# Altium PCB NCLP_PI_v2.PcbDoc (part 1 of 2)
Units mm, origin at the board's own origin, x right, y up, seen from the top; angles counter-clockwise.
Board outline 75.03 x 78.89 mm, 6 copper layers (Top Layer, In_1, In_2, In_3, In_4, Bottom Layer), stack 0.816 mm thick; 104 components, 121 nets, 419 pads, 484 vias.
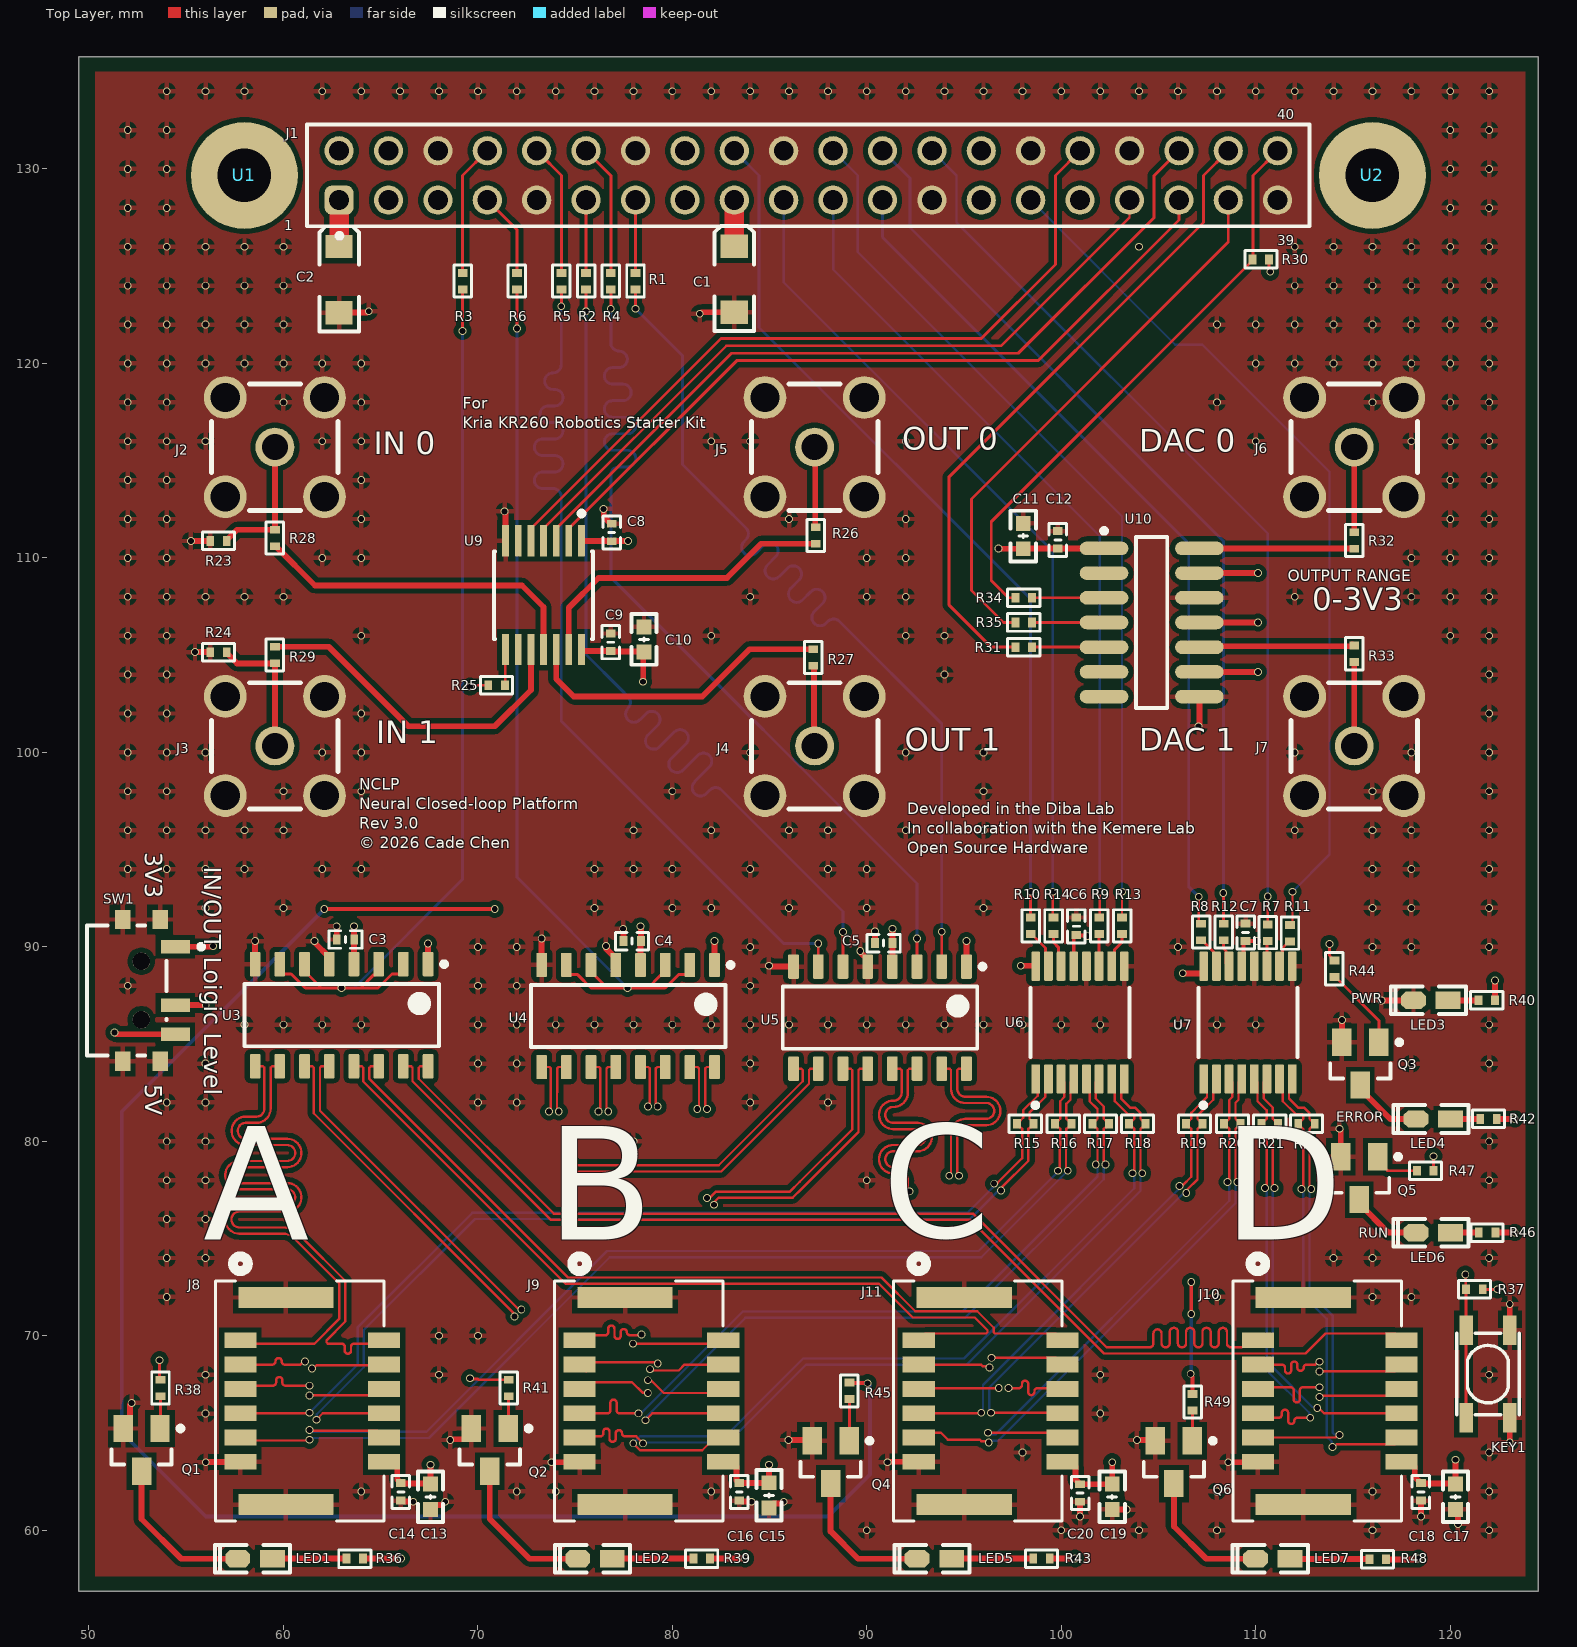
[diagram p0: Top Layer view]
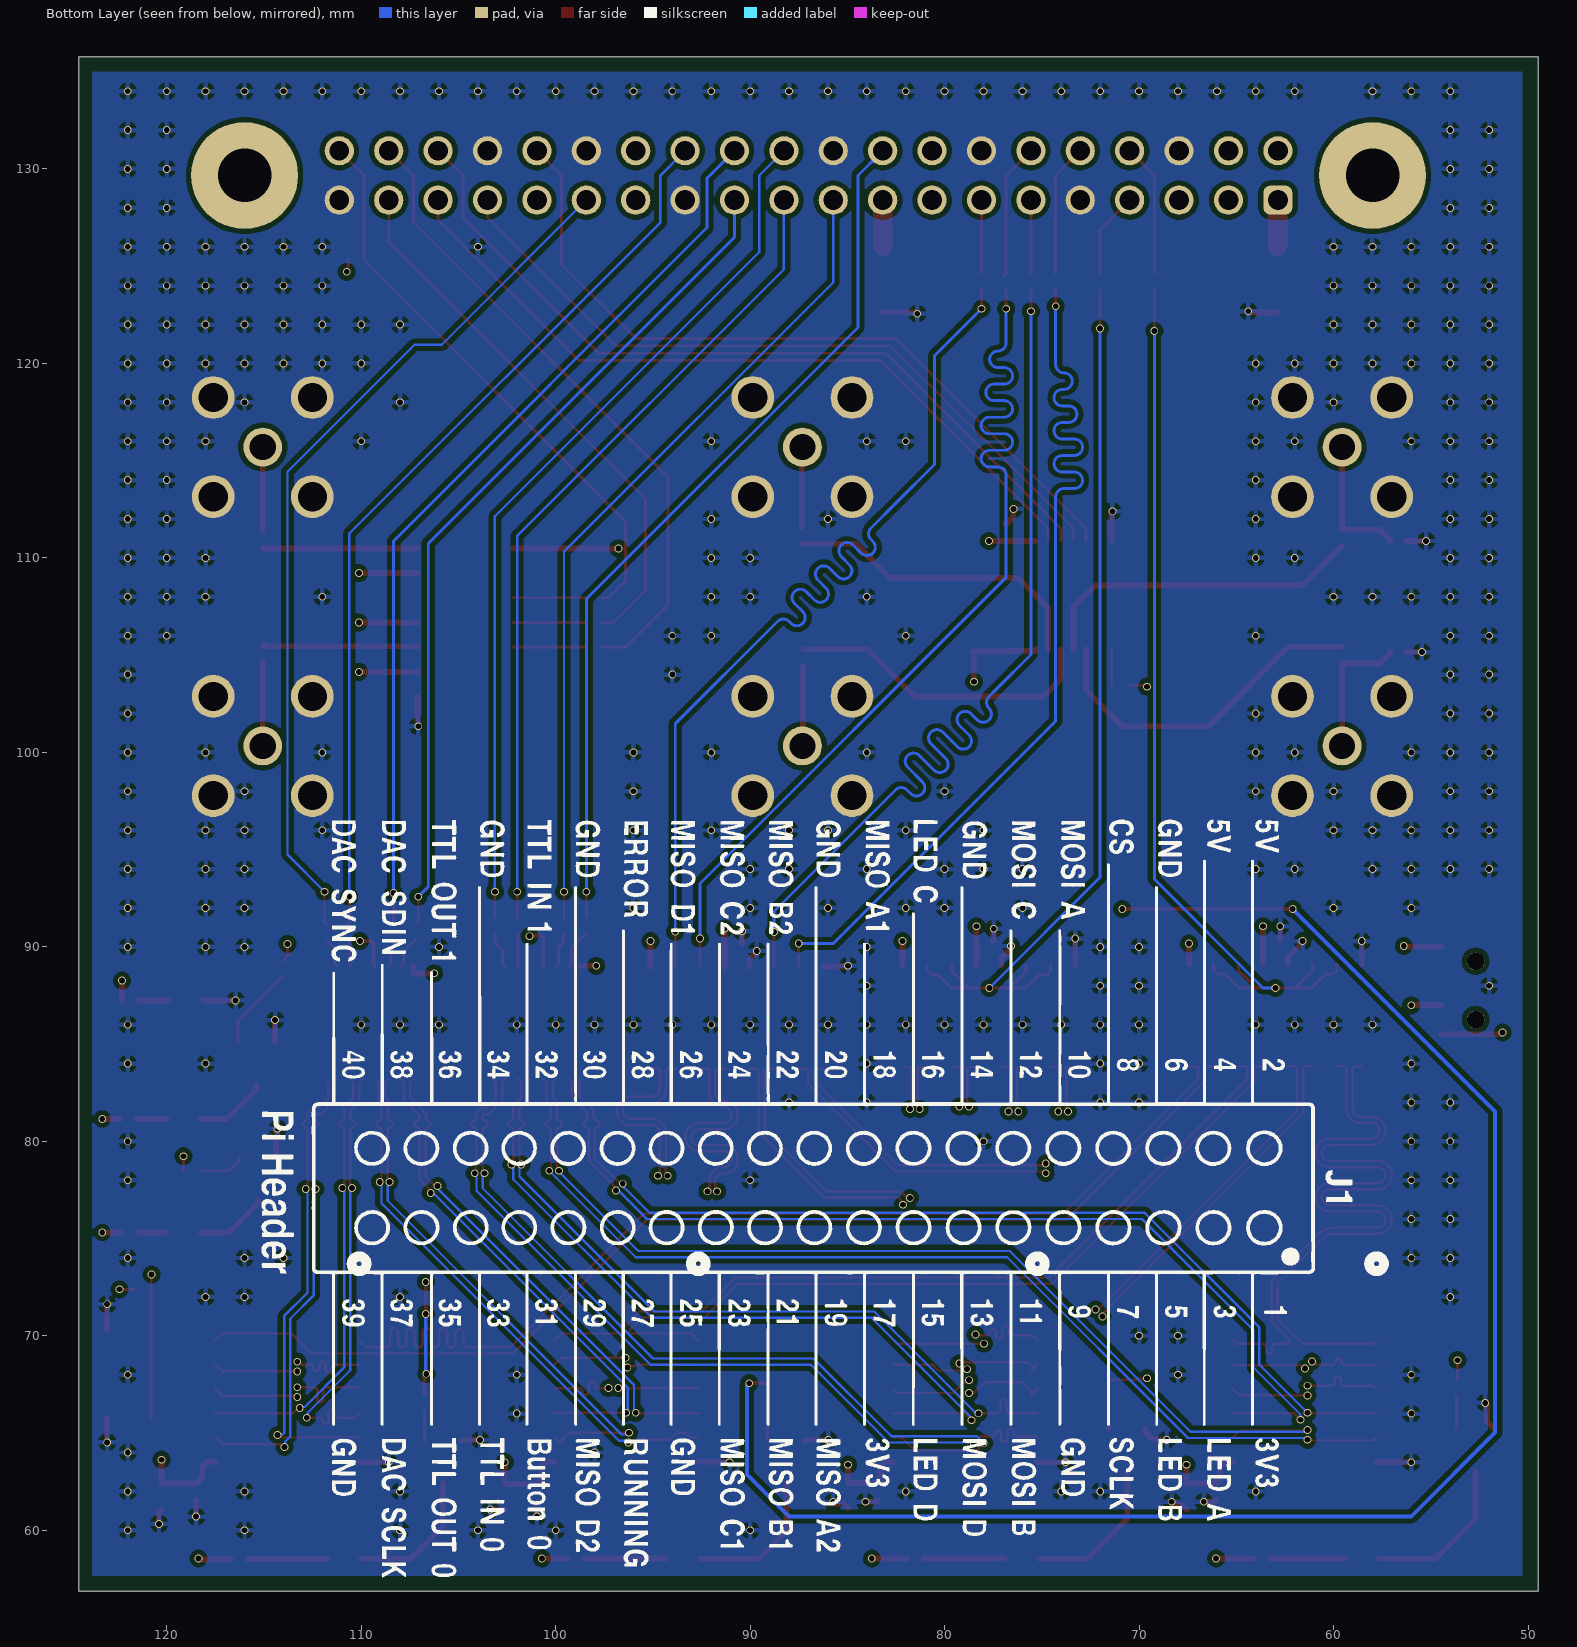
[diagram p1: Bottom Layer view, seen from below]
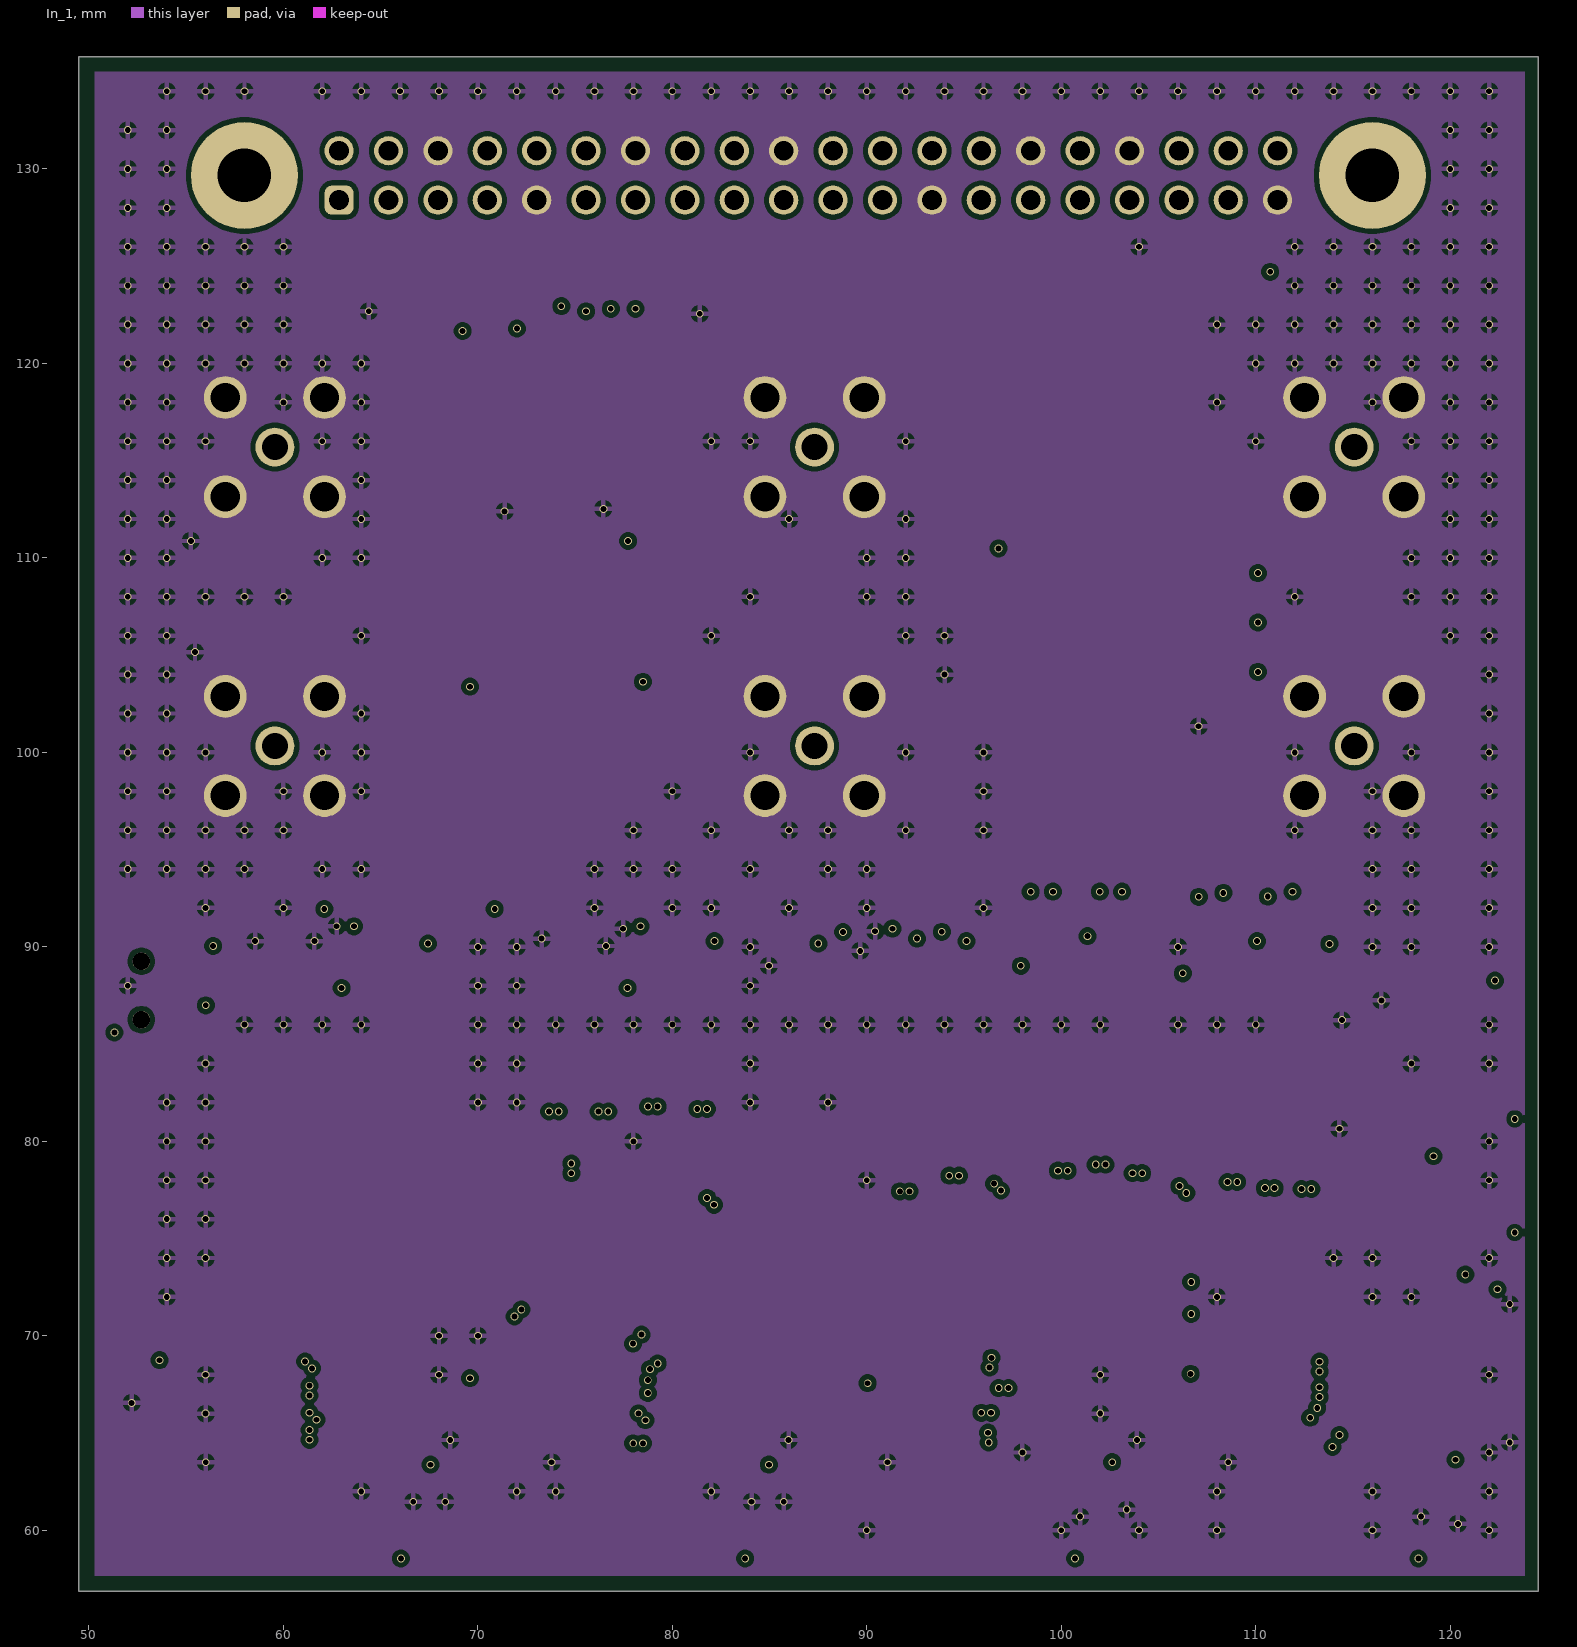
[diagram p2: In_1]
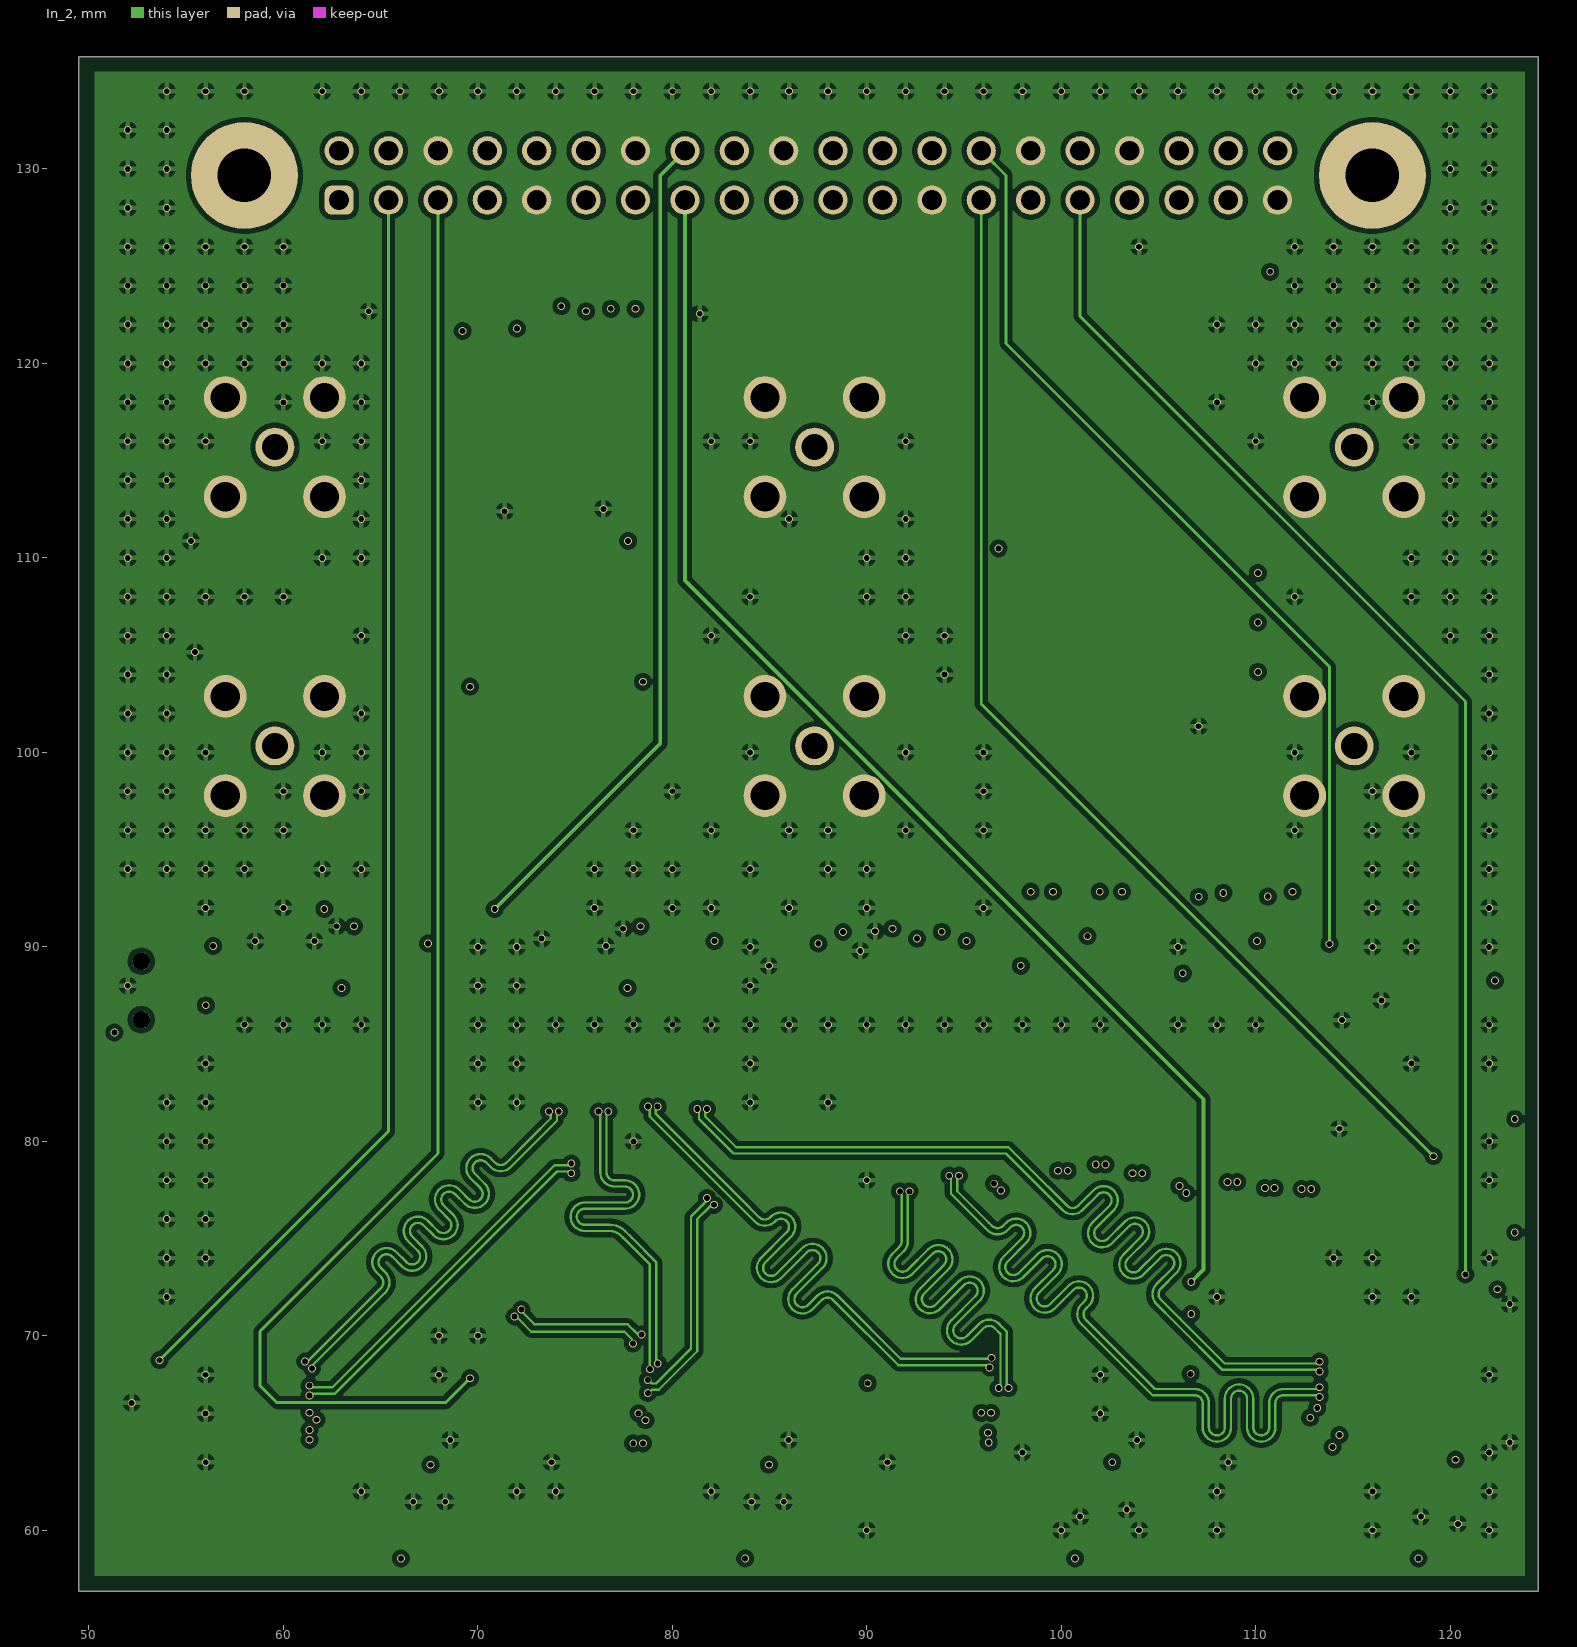
[diagram p3: In_2]
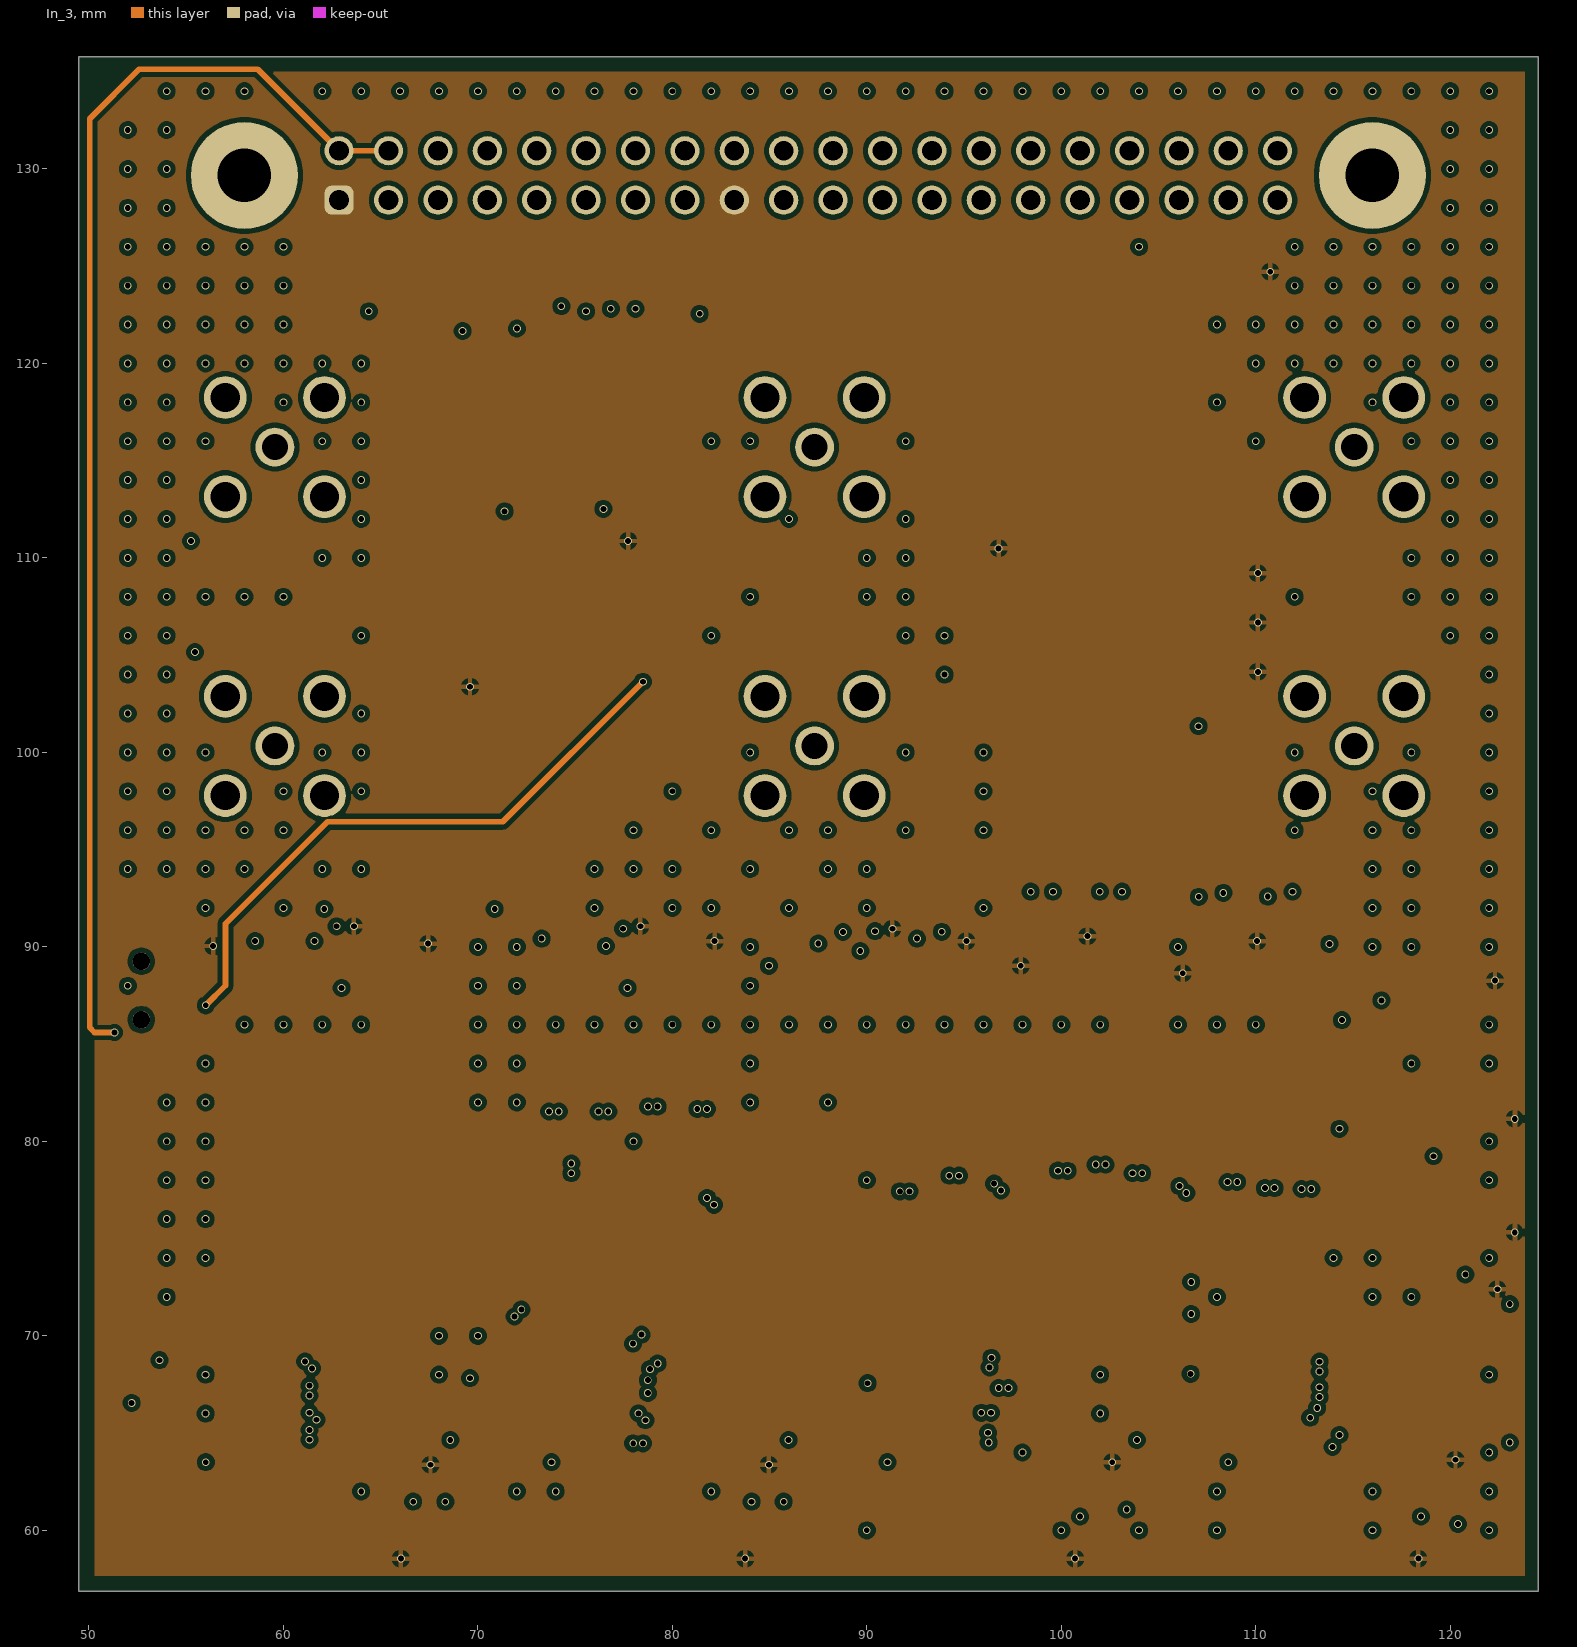
[diagram p4: In_3]
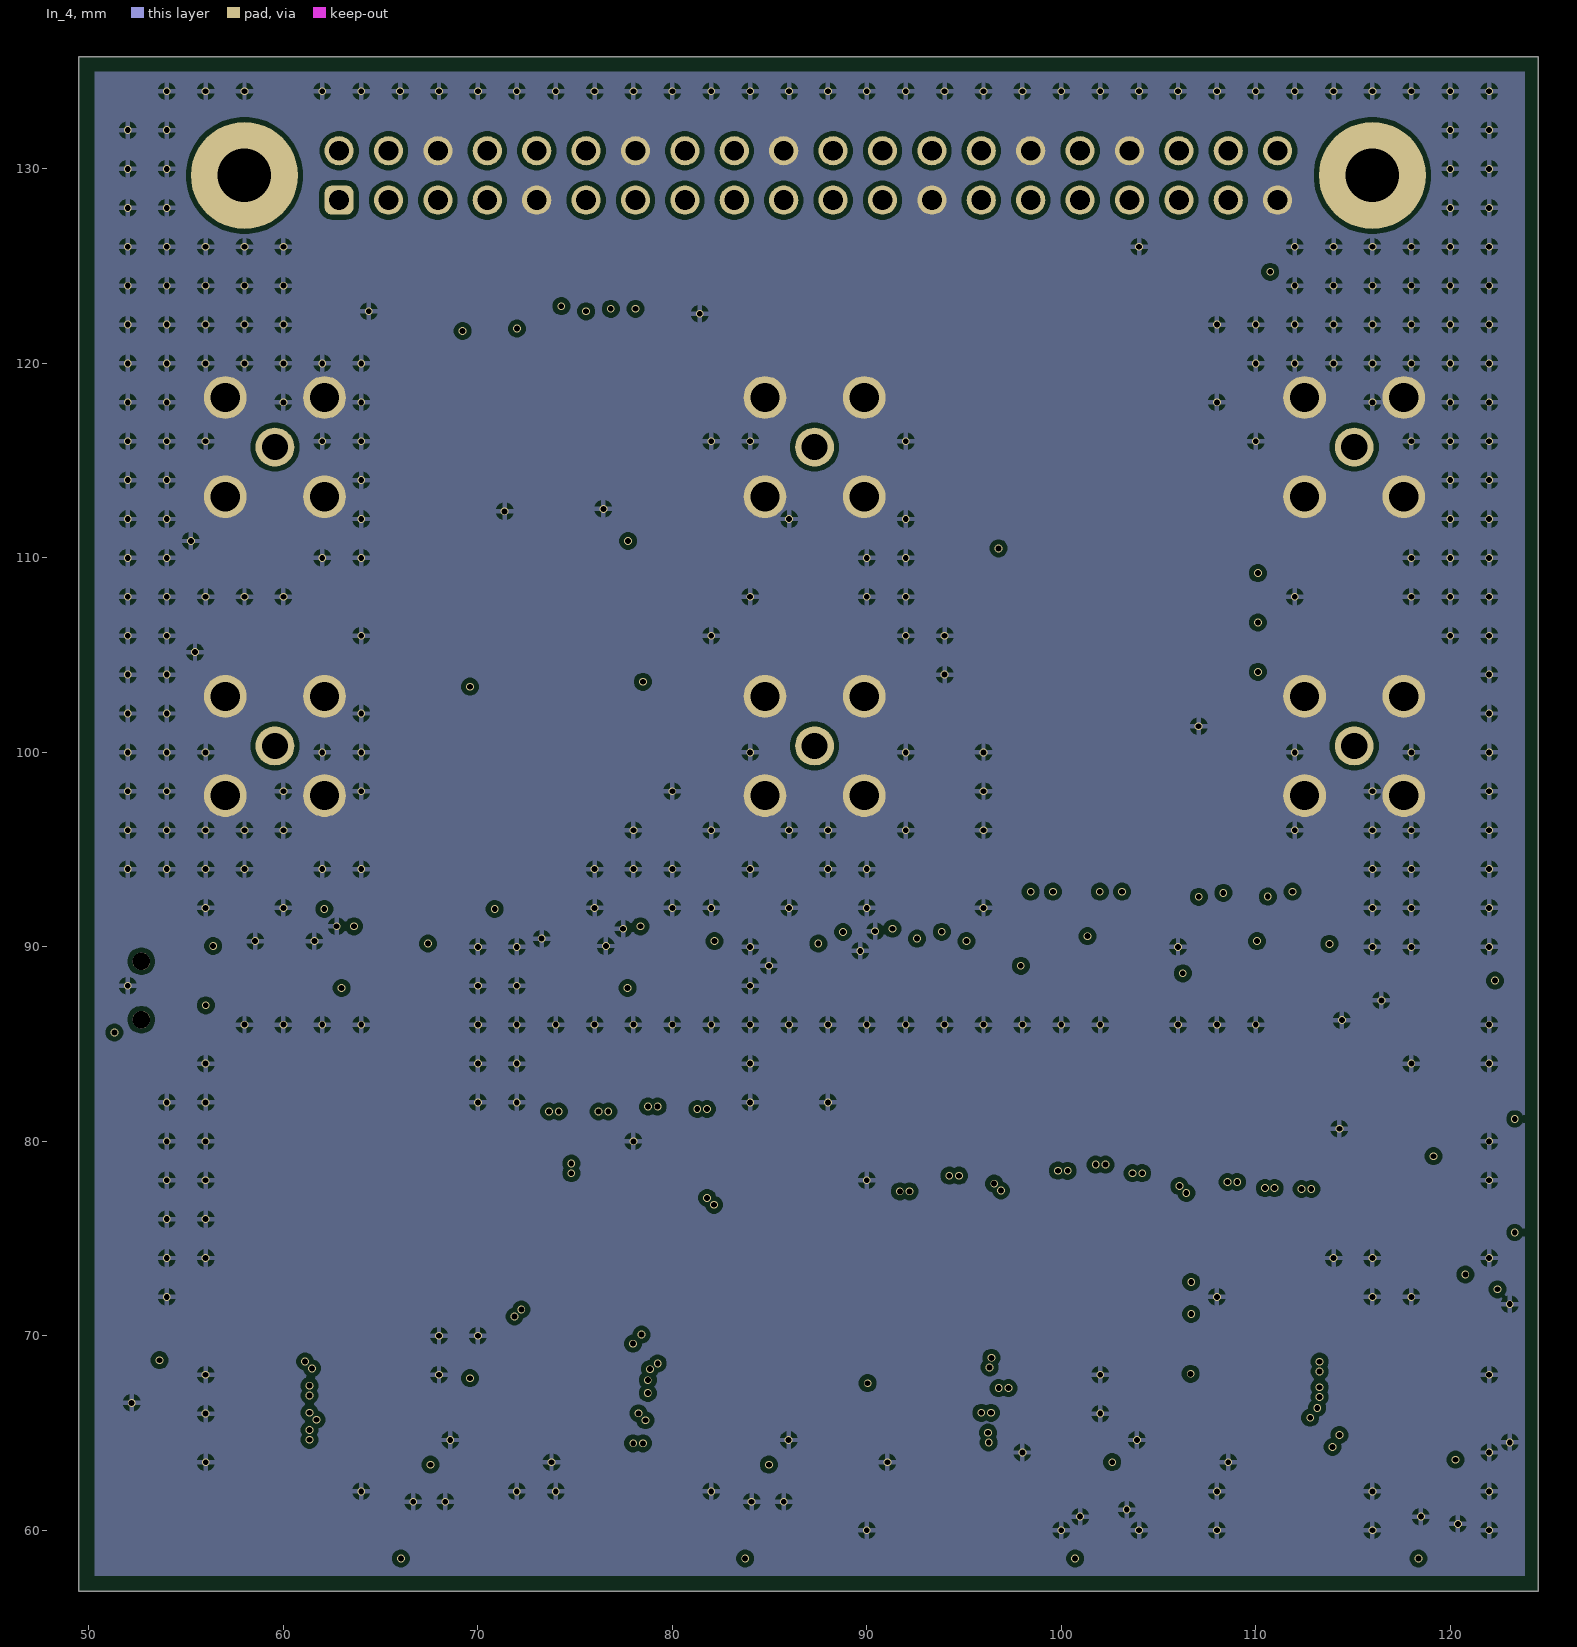
[diagram p5: In_4]
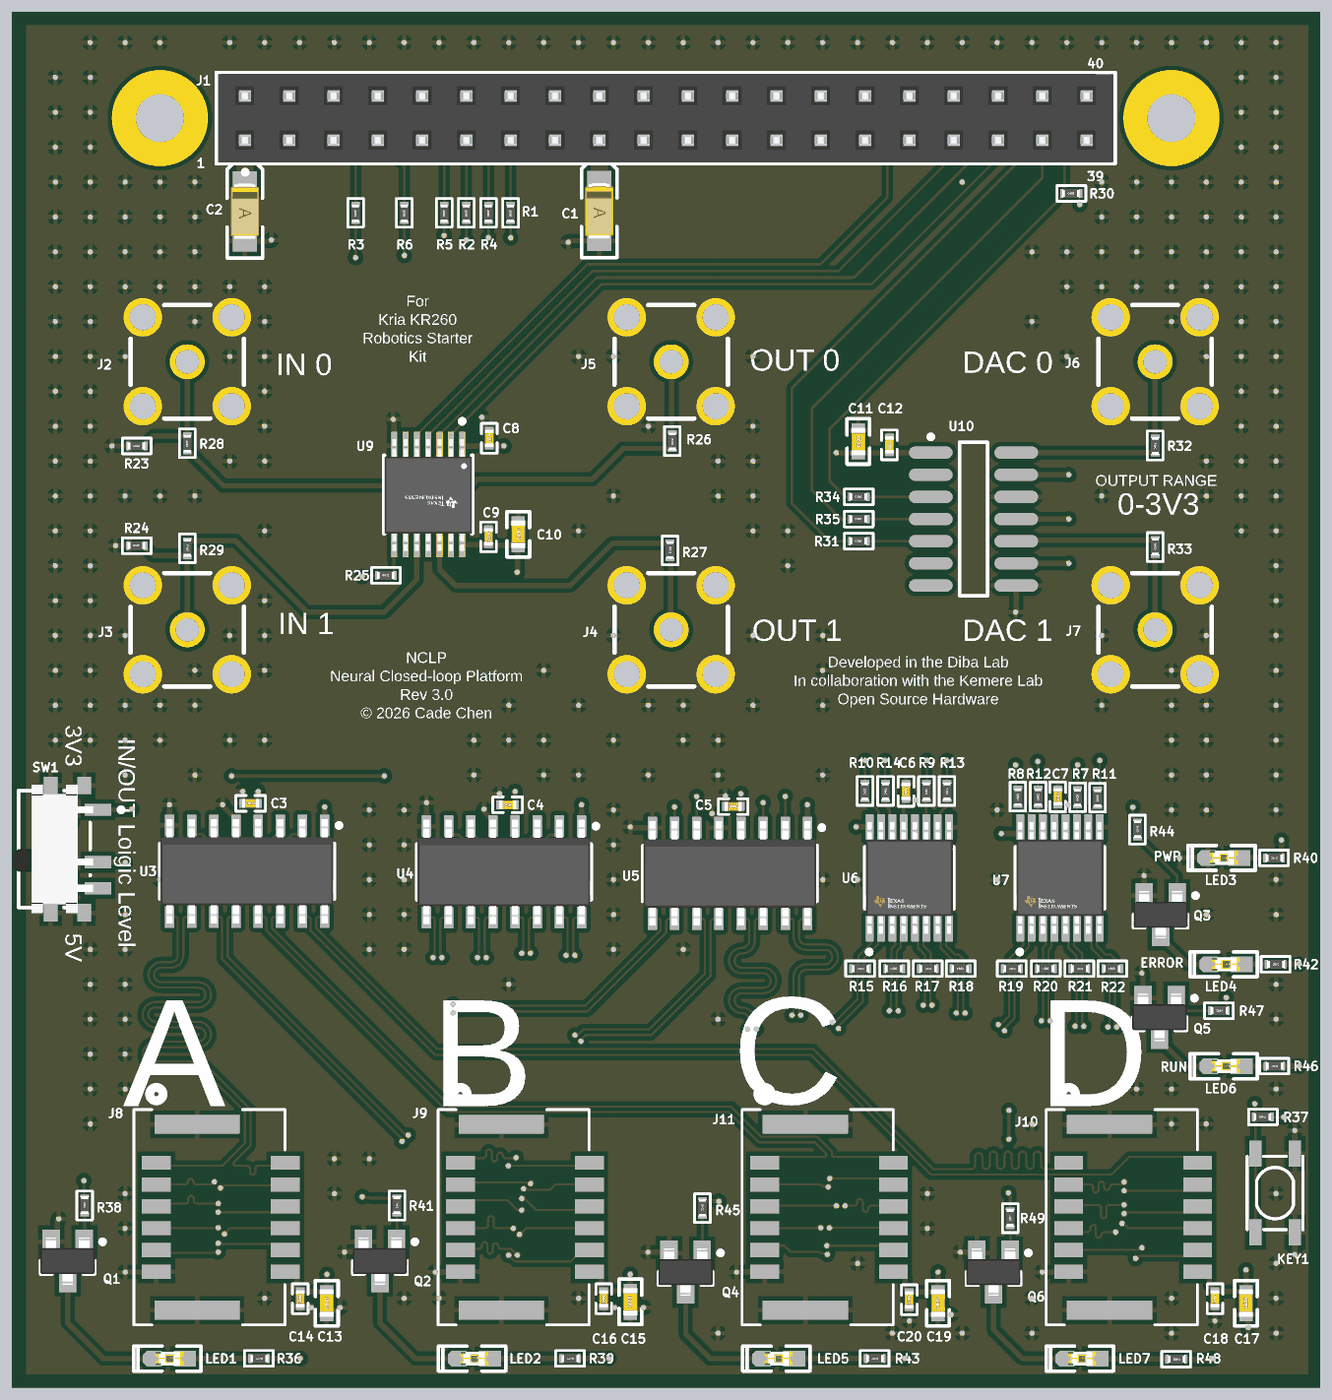
[diagram p7: 3D render of the assembled board from above, using the file's embedded part models]

## Layer stack, top to bottom
Top Solder: solder mask 0.0102, Solder Resist, Dk 3.5
Top Layer: signal copper 0.0356
Dielectric 2: prepreg 0.0711, PP-006, Dk 4.1
In_1: signal copper 0.035
Dielectric 4: prepreg 0.0711, PP-006, Dk 4.1
In_2: signal copper 0.035
Dielectric 1: dielectric 0.32, FR-4, Dk 4.8
In_3: signal copper 0.035
Dielectric 5: prepreg 0.0711, PP-006, Dk 4.1
In_4: signal copper 0.035
Dielectric 3: prepreg 0.0711, PP-006, Dk 4.1
Bottom Layer: signal copper 0.0356
Bottom Solder: solder mask 0.0102, Solder Resist, Dk 3.5

## Board outline
49.484,56.872 49.484,135.763 124.516,135.763 124.516,56.872

## Design rules (kind name [scope] priority, off if disabled: settings)
Clearance Clearance_1 [InPolygon] p1: gap=0.25 ignorepadtopadclearanceinfootprint=FALSE
Clearance [All] p2: gap=0.1 ignorepadtopadclearanceinfootprint=FALSE
ComponentClearance [All] p1: gap=0.1 collisioncheckmode=3 verticalgap=0.1 showdistances=FALSE
DiffPairsRouting [All] p1: maxlimit=10 minlimit=0.2 mostfreqgap=0.2 toplayer_minwidth=0.1 toplayer_maxwidth=10 toplayer_prefwidth=0.12 midlayer1_minwidth=0.1 midlayer1_maxwidth=10 midlayer1_prefwidth=0.12 midlayer2_minwidth=0.1 midlayer2_maxwidth=10 midlayer2_prefwidth=0.12 midlayer3_minwidth=0.1 midlayer3_maxwidth=10 midlayer3_prefwidth=0.12 midlayer4_minwidth=0.1 midlayer4_maxwidth=10 midlayer4_prefwidth=0.12 bottomlayer_minwidth=0.1 bottomlayer_maxwidth=10 bottomlayer_prefwidth=0.12 maxuncoupledlength=12.7
HoleSize [All] p1: absolutevalues=TRUE maxlimit=10 minlimit=0.3 maxpercent=80.000 minpercent=20.000
HoleToHoleClearance [All] p1: gap=0.1 allowstackedmicrovias=TRUE
MatchedLengths SPI [InNetClass('SPI')] p1: tolerance=3 checknetsindiffpair=FALSE checkdiffpairvsdiffpair=TRUE checkxsignals=TRUE checkothers=TRUE
MatchedLengths LVDS_D [InDifferentialPairClass('D')] p2: tolerance=3 checknetsindiffpair=FALSE checkdiffpairvsdiffpair=TRUE checkxsignals=TRUE checkothers=TRUE
MatchedLengths LVDS_C [InDifferentialPairClass('C')] p3: tolerance=5 checknetsindiffpair=FALSE checkdiffpairvsdiffpair=TRUE checkxsignals=TRUE checkothers=TRUE
MatchedLengths LVDS_B [InDifferentialPairClass('B')] p4: tolerance=3 checknetsindiffpair=FALSE checkdiffpairvsdiffpair=TRUE checkxsignals=TRUE checkothers=TRUE
MatchedLengths LVDS_A [InDifferentialPairClass('A')] p5: tolerance=3 checknetsindiffpair=FALSE checkdiffpairvsdiffpair=TRUE checkxsignals=TRUE checkothers=TRUE
MatchedLengths [InDifferentialPairClass('All Differential Pairs')] p6: tolerance=0.5 checknetsindiffpair=TRUE checkdiffpairvsdiffpair=FALSE checkxsignals=FALSE checkothers=FALSE
MinimumSolderMaskSliver [All] p1: minsoldermaskwidth=0
PolygonConnect [All] p1: thpad.connectstyle=Direct thpad.reliefconductorwidth=0.254 thpad.reliefentries=4 thpad.polygonreliefangle="90 Angle" thpad.airgapwidth=0.254 smdpad.connectstyle=Relief smdpad.reliefconductorwidth=0.254 smdpad.reliefentries=4 smdpad.polygonreliefangle="90 Angle" smdpad.airgapwidth=0.254 via.connectstyle=Relief via.reliefconductorwidth=0.254 via.reliefentries=4 via.polygonreliefangle="90 Angle" via.airgapwidth=0.254
RoutingVias [All] p1: holewidth=0.3 width=0.4 viastyle="Through Hole" minholewidth=0.3 minwidth=0.4 maxholewidth=0.711 maxwidth=1.27
SilkToSilkClearance [All] p1: silktosilkclearance=0
SilkToSolderMaskClearance [IsPad] p1: minsilkscreentomaskgap=0 clearancetoexposedcopper=TRUE
SolderMaskExpansion [All] p1: expansion=0 istentingtop=FALSE
SupplyNets "Schematic Supply Nets_2" [InNet('3V3')] p1: voltage=0.000
SupplyNets "Schematic Supply Nets_1" [InNet('GND')] p2: voltage=0.000
SupplyNets "Schematic Supply Nets" [InNet('5V')] p3: voltage=0.000
Width [All] p1: maxlimit=2 minlimit=0.1 preferedwidth=0.15
23 further rules are at their usual default settings.

## Classes and differential pairs
net class SPI: CS' MOSI_A' MOSI_B' MOSI_C' MOSI_D' SCLK'
differential pair class D: CS_D MOSI_D SCLK_D
differential pair class C: CS_C MOSI_C SCLK_C
differential pair class B: CS_B MOSI_B SCLK_B
differential pair class A: CS_A MOSI_A SCLK_A
component class SMA: C8 C9 C10 C11 C12 J2 J3 J4 J5 J6 J7 R23 R24 R25 R26 R27 R28 R29 R30 R31 R32 R33 R34 R35 SW1 U9 U10
component class Connectors: C13 C14 C15 C16 C17 C18 C19 C20 J8 J9 J10 J11
component class LVDS_TX: C3 C4 C5 U3 U4 U5
component class LVDS_RX: C6 C7 R15 R16 R17 R18 R19 R20 R21 R22 U6 U7
component class LED_Button: KEY1 LED1 LED2 LED3 LED4 LED5 LED6 LED7 Q1 Q2 Q3 Q4 Q5 Q6 R36 R37 R38 R39 R40 R41 R42 R43 R44 R45 R46 R47 R48 R49
component class Header: C1 C2 J1 R1 R2 R3 R4 R5 R6 R7 R8 R9 R10 R11 R12 R13 R14 U1 U2
differential pair SCLK_D: +SCLK_D_P -SCLK_D_N
differential pair SCLK_C: +SCLK_C_P -SCLK_C_N
differential pair SCLK_B: +SCLK_B_P -SCLK_B_N
differential pair SCLK_A: +SCLK_A_P -SCLK_A_N
differential pair MOSI_D: +MOSI_D_P -MOSI_D_N
differential pair MOSI_C: +MOSI_C_P -MOSI_C_N
differential pair MOSI_B: +MOSI_B_P -MOSI_B_N
differential pair MOSI_A: +MOSI_A_P -MOSI_A_N
differential pair MISO_D2: +MISO_D2_P -MISO_D2_N
differential pair MISO_D1: +MISO_D1_P -MISO_D1_N
differential pair MISO_C2: +MISO_C2_P -MISO_C2_N
differential pair MISO_C1: +MISO_C1_P -MISO_C1_N
differential pair MISO_B2: +MISO_B2_P -MISO_B2_N
differential pair MISO_B1: +MISO_B1_P -MISO_B1_N
differential pair MISO_A2: +MISO_A2_P -MISO_A2_N
differential pair MISO_A1: +MISO_A1_P -MISO_A1_N
differential pair CS_D: +CS_D_P -CS_D_N
differential pair CS_C: +CS_C_P -CS_C_N
differential pair CS_B: +CS_B_P -CS_B_N
differential pair CS_A: +CS_A_P -CS_A_N

## Components (designator, comment, footprint, x,y, rotation, side; value= is the part's Value field where it differs from the comment)
C1 "47uF" "CD A(3216)" 83.185,124.333 r270 top
C2 "47uF" "CD A(3216)" 62.863,124.312 r270 top
C3 "100n" "C 0402_L" 63.195,90.379 r0 top
C4 "100n" "C 0402_L" 77.934,90.297 r0 top
C5 "100n" "C 0402_L" 90.869,90.197 r0 top
C6 "100n" "C 0402_L" 100.775,91.059 r270 top
C7 "100n" "C 0402_L" 109.474,90.747 r270 top
C8 "100n" "C 0402_L" 76.883,111.312 r270 top
C9 "100n" "C 0402_L" 76.835,105.664 r270 top
C10 "10u" "C 0603_L" 78.543,105.806 r270 top
C11 "10u" "C 0603_L" 98.044,111.125 r270 top
C12 "100n" "C 0402_L" 99.822,110.929 r270 top
C13 "10u" "C 0603_L" 67.564,61.722 r90 top
C14 "100n" "C 0402_L" 66.04,61.976 r90 top
C15 "10u" "C 0603_L" 84.97,61.798 r90 top
C16 "100n" "C 0402_L" 83.439,61.976 r90 top
C17 "10u" "C 0603_L" 120.269,61.722 r90 top
C18 "100n" "C 0402_L" 118.491,61.976 r90 top
C19 "10u" "C 0603_L" 102.616,61.722 r90 top
C20 "100n" "C 0402_L" 100.965,61.918 r90 top
J1 "Pi Header" 61304021821 86.995,129.667 r0 top locked
J2 "6GHz" "PCBComponent_1 - duplicate2" 59.563,115.697 r0 top
J3 "6GHz" "PCBComponent_1 - duplicate2" 59.563,100.33 r0 top
J4 "6GHz" "PCBComponent_1 - duplicate2" 87.312,100.33 r0 top
J5 "6GHz" "PCBComponent_1 - duplicate2" 87.312,115.697 r0 top
J6 "6GHz" "PCBComponent_1 - duplicate2" 115.062,115.697 r0 top
J7 "6GHz" "PCBComponent_1 - duplicate2" 115.062,100.33 r0 top
J8 "5054331271" CONN_505433_12_MOL 60.833,66.645 r90 top locked
J9 "5054331271" CONN_505433_12_MOL 78.273,66.645 r90 top locked
J10 "5054331271" CONN_505433_12_MOL 113.153,66.645 r90 top locked
J11 "5054331271" CONN_505433_12_MOL 95.713,66.645 r90 top locked
KEY1 "Button" KEY_SOP324225 120.338,70.136 r270 top
LED1 "LED_GREEN" "LED 0603R" 58.547,58.547 r180 top
LED2 "LED_GREEN" "LED 0603R" 76.025,58.547 r180 top
LED3 "LED_GREEN" "LED 0603R" 118.999,87.256 r180 top
LED4 "LED_RED" "LED 0603R" 119.126,81.153 r180 top
LED5 "LED_GREEN" "LED 0603R" 93.472,58.547 r180 top
LED6 "LED_GREEN" "LED 0603R" 119.126,75.311 r180 top
LED7 "LED_GREEN" "LED 0603R" 110.871,58.547 r180 top
Q1 "MMBT3904" FAIR-SOT23-3_V 52.705,64.135 r270 top
Q2 "MMBT3904" FAIR-SOT23-3_V 70.612,64.135 r270 top
Q3 "MMBT3904" FAIR-SOT23-3_V 115.377,83.99 r270 top
Q4 "MMBT3904" FAIR-SOT23-3_V 88.138,63.5 r270 top
Q5 "MMBT3904" FAIR-SOT23-3_V 115.316,78.105 r270 top
Q6 "MMBT3904" FAIR-SOT23-3_V 105.791,63.5 r270 top
R1 "22" "R 0402_L" 78.105,124.206 r90 top
R2 "22" "R 0402_L" 75.565,124.206 r90 top
R3 "22" "R 0402_L" 69.215,124.206 r90 top
R4 "22" "R 0402_L" 76.835,124.206 r90 top
R5 "22" "R 0402_L" 74.295,124.206 r90 top
R6 "22" "R 0402_L" 72.009,124.206 r90 top
R7 "22" "R 0402_L" 110.615,90.703 r90 top
R8 "22" "R 0402_L" 107.188,90.736 r90 top
R9 "22" "R 0402_L" 101.949,91.059 r90 top
R10 "22" "R 0402_L" 98.425,91.059 r90 top
R11 "22" "R 0402_L" 111.76,90.678 r90 top
R12 "22" "R 0402_L" 108.349,90.737 r90 top
R13 "22" "R 0402_L" 103.124,91.059 r90 top
R14 "22" "R 0402_L" 99.6,91.059 r90 top
R15 "100" "R 0402_L" 98.171,80.899 r180 top
R16 "100" "R 0402_L" 100.076,80.899 r0 top
R17 "100" "R 0402_L" 102.05,80.899 r180 top
R18 "100" "R 0402_L" 103.886,80.899 r0 top
R19 "100" "R 0402_L" 106.865,80.899 r180 top
R20 "100" "R 0402_L" 108.77,80.899 r0 top
R21 "100" "R 0402_L" 110.744,80.899 r180 top
R22 "100" "R 0402_L" 112.58,80.899 r0 top
R23 "100K" "R 0402_L" 56.642,110.871 r0 top
R24 "100K" "R 0402_L" 56.642,105.156 r0 top
R25 "1K" "R 0402_L" 70.937,103.454 r0 top
R26 "22" "R 0402_L" 87.376,111.125 r90 top
R27 "22" "R 0402_L" 87.249,104.902 r270 top
R28 "22" "R 0402_L" 59.563,110.998 r90 top
R29 "22" "R 0402_L" 59.563,105.029 r270 top
R30 "10K" "R 0402_L" 110.236,125.349 r0 top
R31 "22" "R 0402_L" 98.044,105.41 r0 top
R32 "22" "R 0402_L" 115.062,110.871 r90 top
R33 "22" "R 0402_L" 115.062,105.098 r270 top
R34 "22" "R 0402_L" 98.044,107.95 r0 top
R35 "22" "R 0402_L" 98.044,106.68 r0 top
R36 "1K" "R 0402_L" 63.696,58.547 r180 top
R37 "10K" "R 0402_L" 121.216,72.39 r0 top
R38 "10K" "R 0402_L" 53.681,67.341 r270 top
R39 "1K" "R 0402_L" 81.534,58.547 r180 top
R40 "1K" "R 0402_L" 121.901,87.249 r180 top
R41 "10K" "R 0402_L" 71.585,67.341 r270 top
R42 "1K" "R 0402_L" 121.989,81.153 r180 top
R43 "1K" "R 0402_L" 99.002,58.547 r180 top
R44 "10K" "R 0402_L" 114.046,88.9 r270 top
R45 "10K" "R 0402_L" 89.105,67.197 r270 top
R46 "1K" "R 0402_L" 121.92,75.311 r180 top
R47 "10K" "R 0402_L" 118.745,78.486 r180 top
R48 "1K" "R 0402_L" 116.292,58.504 r180 top
R49 "10K" "R 0402_L" 106.752,66.613 r270 top
SW1 "PCM12SMTR" FP-PCM12SMTR-MFG 51.943,87.757 r270 top
U1 "MOUNTING HOLE" mounting_hole#1 57.912,129.413 r0 top locked
U2 "MOUNTING HOLE" mounting_hole#2 116.205,129.54 r0 top
U3 "DS90LV047ATM/NOPB" D0016A_L 62.992,86.487 r270 top
U4 "DS90LV047ATM/NOPB" D0016A_L 77.724,86.445 r270 top
U5 "DS90LV047ATM/NOPB" D0016A_L 90.678,86.36 r270 top
U6 "DS90LV048ATMTCX/NOPB" FP-PW0016A-MFG 100.965,86.106 r90 top
U7 "DS90LV048ATMTCX/NOPB" FP-PW0016A-MFG 109.601,86.106 r90 top
U9 "TXU0204QPWRQ1" FP-PW0014A-MFG 73.376,108.083 r270 top
U10 "MCP4922T-E/SL" SOIC-SL14_M 104.648,106.68 r0 top

## Footprints (in the part's own frame and the unit in brackets; to place one, negate y for a bottom-side part, rotate by r counter-clockwise, add the part's x,y. Pads: shape width x height; smd on the part's side, far side on the other; paste and mask are expansions set on the pad)
61304021821 [mm] "Socket Header, Pitch 2.54 mm, THT, Vertical, dual row, 40p"
  rrect50% 1.5x1.5 hole 1.02: 1(-24.13,-1.27)
  round 1.5 hole 1.02: 2(-24.13,1.27) 3(-21.59,-1.27) 4(-21.59,1.27) 5(-19.05,-1.27) 6(-19.05,1.27) 7(-16.51,-1.27) 8(-16.51,1.27) 9(-13.97,-1.27) 10(-13.97,1.27) 11(-11.43,-1.27) 12(-11.43,1.27) 13(-8.89,-1.27) 14(-8.89,1.27) 15(-6.35,-1.27) 16(-6.35,1.27) 17(-3.81,-1.27) 18(-3.81,1.27) 19(-1.27,-1.27) 20(-1.27,1.27) 21(1.27,-1.27) 22(1.27,1.27) 23(3.81,-1.27) 24(3.81,1.27) 25(6.35,-1.27) 26(6.35,1.27) 27(8.89,-1.27) 28(8.89,1.27) 29(11.43,-1.27) 30(11.43,1.27) 31(13.97,-1.27) 32(13.97,1.27) 33(16.51,-1.27) 34(16.51,1.27) 35(19.05,-1.27) 36(19.05,1.27) 37(21.59,-1.27) 38(21.59,1.27) 39(24.13,-1.27) 40(24.13,1.27)
  silkscreen extent -25.78,-3.22 25.78,2.62, body extent -25.65,-2.54 25.65,2.54, height 8.45
"C 0402_L" [mm]
  rect 0.4x0.5 smd: 1(-0.45,0) 2(0.45,0)
  silkscreen extent -0.85,-0.45 0.85,0.45, body extent -0.5,-0.26 0.5,0.26, height 0.53
"C 0603_L" [mil]
  rect 30x30 smd: 1(-25.59,0) 2(25.59,0)
  silkscreen extent -51,-26 51,26, body extent -31,-16 31,16, height 32
"CD A(3216)" [mm]
  rect 1.2x1.4 smd: 1(-1.7,0) 2(1.7,0)
  silkscreen extent -2.74,-1.02 2.67,1.02, body extent -1.6,-0.8 1.6,0.8, height 1.6
CONN_505433_12_MOL [mil]
  rect 32x65 smd paste+0 mask+0: 1(123.03,119.83) 2(123.03,-171.11) 3(73.82,119.83) 4(73.82,-171.11) 5(24.61,119.83) 6(24.61,-171.11) 7(-24.61,119.83) 8(-24.61,-171.11) 9(-73.82,119.83) 10(-73.82,-171.11) 11(-123.03,119.83) 12(-123.03,-171.11)
  rect 43x193 smd paste+0 mask+0: 13(-209.65,27.7) 14(209.65,27.7)
  silkscreen extent -243,-171 293,171
D0016A_L [mm] "SOIC, 16-Leads, Body 10x4mm, Pitch 1.27mm, IPC High Density"
  rrect18% 1.25x0.55 smd: 1(-2.625,4.445) 2(-2.625,3.175) 3(-2.625,1.905) 4(-2.625,0.635) 5(-2.625,-0.635) 6(-2.625,-1.905) 7(-2.625,-3.175) 8(-2.625,-4.445) 9(2.625,-4.445) 10(2.625,-3.175) 11(2.625,-1.905) 12(2.625,-0.635) 13(2.625,0.635) 14(2.625,1.905) 15(2.625,3.175) 16(2.625,4.445)
  silkscreen extent -2.75,-5 1.6,5.4, body extent -3,-4.95 3,4.95, height 1.59
FAIR-SOT23-3_V [mm] "SOT23, 3-Leads, Body 3.12x1.5mm, Pitch 0.95mm"
  rect 1.4x1 smd: 1(-1.1,0.95) 2(-1.1,-0.95) 3(1.1,0)
  silkscreen extent -1.22,-1.55 0.75,2.13, body extent -1.35,-1.56 1.35,1.56, height 1.2
FP-PCM12SMTR-MFG [mm]
  rect 0.7x1.5 smd paste+0 mask+0: 1(-2.25,2.5) 2(0.75,2.5) 3(2.25,2.5)
  rect 1x0.8 smd paste+0 mask+0: 4(-3.65,1.715) 5(3.65,1.715) 6(-3.65,-0.215) 7(3.65,-0.215)
  round 0.9 hole 0.9 unplated paste-2539.97 mask+0: ""(-1.5,0.75) ""(1.5,0.75)
  silkscreen extent -3.35,-2.05 3.35,3.95, body extent -4.25,-2.15 4.25,3.35, height 0.25
FP-PW0014A-MFG [mm]
  rect 1.6x0.35 smd paste-1000 mask+0: 1(-2.8,1.95) 2(-2.8,1.3) 3(-2.8,0.65) 4(-2.8,0) 5(-2.8,-0.65) 6(-2.8,-1.3) 7(-2.8,-1.95) 8(2.8,-1.95) 9(2.8,-1.3) 10(2.8,-0.65) 11(2.8,0) 12(2.8,0.65) 13(2.8,1.3) 14(2.8,1.95)
  silkscreen extent -4.32,-2.55 2.25,2.55, body extent -3.7,-2.8 3.7,2.8, height 0.25
FP-PW0016A-MFG [mm]
  rrect22% 1.5x0.45 smd paste+0 mask+0: 1(-2.9,2.275) 2(-2.9,1.625) 3(-2.9,0.975) 4(-2.9,0.325) 5(-2.9,-0.325) 6(-2.9,-0.975) 7(-2.9,-1.625) 8(-2.9,-2.275) 9(2.9,-2.275) 10(2.9,-1.625) 11(2.9,-0.975) 12(2.9,-0.325) 13(2.9,0.325) 14(2.9,0.975) 15(2.9,1.625) 16(2.9,2.275)
  silkscreen extent -4.37,-2.55 1.78,2.55, body extent -3.75,-2.8 3.75,2.8, height 0.25
KEY_SOP324225 [mm]
  rect 1.5x0.7 smd: 1(-0.15,2.725) 1(4.35,2.725) 2(-0.15,0.475) 2(4.35,0.475)
  silkscreen extent 0,0 4.2,3.2
"LED 0603R" [mil]
  rect 50x35 smd: 1(-35,0.26)
  oct 50x35 smd: 2(35,0.26)
  silkscreen extent -71,-28 81,28, body extent -31,-16 31,16, height 18
mounting_hole#1 [mm]
  round 5.5 hole 2.75: 1(0.083,0.254)
mounting_hole#2 [mm]
  round 5.5 hole 2.75: 1(-0.21,0.127)
"PCBComponent_1 - duplicate2" [mm]
  round 2.2 hole 1.501: 1(-2.55,-2.55) 2(-2.55,2.55) 3(2.55,2.55) 4(2.55,-2.55)
  round 1.999 hole 1.349: 5(0,0)
  silkscreen extent -3.25,-3.25 3.25,3.25
"R 0402_L" [mm]
  rect 0.4x0.5 smd: 1(-0.4,0) 2(0.45,0)
  silkscreen extent -0.8,-0.45 0.85,0.45, body extent -0.5,-0.25 0.5,0.25, height 0.3
SOIC-SL14_M [mm] "SOIC, 14-Leads, Body 8.7x3.9mm, Pitch 1.27mm, IPC Low Density"
  oval 2.5x0.7 smd: 1(-2.45,3.81) 2(-2.45,2.54) 3(-2.45,1.27) 4(-2.45,0) 5(-2.45,-1.27) 6(-2.45,-2.54) 7(-2.45,-3.81) 8(2.45,-3.81) 9(2.45,-2.54) 10(2.45,-1.27) 11(2.45,0) 12(2.45,1.27) 13(2.45,2.54) 14(2.45,3.81)
  silkscreen extent -2.57,-4.4 0.8,4.83, body extent -2,-4.38 2,4.38, height 1.75

## Part data
C1 C2: library part CAP
C3 C4 C5 C6 C7 C8 C9 C10 C11 C12 C14 C16 C18 C20: library part C_1
C13 C15 C17 C19: library part C_1_8
J1: library part CMP-1502-01370-4, "THT Vertical Socket Header WR-PHD, Pitch 2.54 mm, Dual Row, 40 pins", Contact Resistance=20mΩ, Current Rating=3A, Operating Supply Voltage=250V, Gender=Female, Lead Pitch=2.54mm, Number of Pins=40, Orientation=Vertical
J2 J3 J4 J5 J6 J7: library part BWSMA-KE-Z001_C496549, "Connector Type:Board Side Interface:Inner Bore Number of Ports:1 Interface Diameter:6.2mm Interface Length/Height:- Frequency:6GHz RF Series:SMA Impedance:50Ω Style:Positive Pin Operating Temperature Range:-65℃~+165℃ Operating Temperature Range:-65℃~+165℃", JLCPCB Part Class="Extended Part", LCSC Part Name="内孔 SMA 正脚", Manufacturer="BAT WIRELESS(蝙蝠无线)", Manufacturer Part=BWSMA-KE-Z001, Operating Temperature Range=-65℃~+165℃, AddInBom=yes, Connector Type="Board Side", ConvertToPcb=yes, Datasheet=https://item.szlcsc.com/datasheet/BWSMA-KE-Z001/508498.html, Device=BWSMA-KE-Z001_C496549, FootprintName=SMA-TH_BWSMA-KE-Z001, Impedance=50Ω, Interface="Inner Bore", Interface Diameter=6.2mm, Interface Length/Height=-, ModelId=f6f48ffe9da340b09a5b7cf26dc9292d聨0819f05c4eef4c71ace90d822a990e87, ModelName=SMA-TH_5P-L6.5-W6.5-H9.8_BWSMA-KE-Z001, ModelTransform=255.905,255.905,0,0,0,0,0,0,-137.795, Number of Ports=1, RF Series=SMA, Style="Positive Pin", Supplier=LCSC, Supplier Footprint=插件, Supplier Part=C496549, Symbol=BWSMA-KE-Z001
J8 J9 J10 J11: "1.25mm Pitch, Micro-Lock Plus PCB Header, Dual Row, Vertical, Surface Mount, Tin-Bismuth Plating, Positive Lock, 12 Circuits, Black", Manufacturer_Name="Molex Connector Corporation", Copyright="Copyright (C) 2025 Ultra Librarian. All rights reserved.", Manufacturer_Part_Number=5054331271, RefDes=RefDes, Type=Type
KEY1: library part KEY_M
LED1 LED2 LED3 LED4 LED5 LED6 LED7: library part LED
Q1 Q2 Q3 Q4 Q5 Q6: library part CMP-1670-00008-1, "NPN General Purpose Amplifier, 40 V, 0.2 A, -55 to 150 degC, 3-Pin SOT23, RoHS, Tape and Reel", Capacitance="1.8E-11 f", Frequency="12.288 MHz", Frequency Tolerance=30ppm, Load Capacitance="18 pF", Max Operating Temperature=70degC, Min Operating Temperature=-20degC, Package Quantity=1000, ComponentLink1Description="Manufacturer URL", ComponentLink1URL=https://www.fairchildsemi.com/, ComponentLink2Description=Datasheet, ComponentLink2URL=https://www.fairchildsemi.com/datasheets/MM/MMBT3904.pdf, ComponentLink3Description="Package Specification", ComponentLink3URL=http://www.fairchildsemi.com/dwg/MA/MA03D.pdf, DatasheetVersion="Rev. 1.1.0, 10/2014", ESR="40 Ohm", Height="0.041 inch", Length="0.197 inch", Mount="Surface Mount", PackageDescription="3-Pin Small Outline Transistor, Body 2.92 x 1.325 mm, Pitch 0.95 mm", PackageReference=SOT23-3, Packaging="Tape and Reel", Pins=4, REACH SVHC="No SVHC", RoHSCompliant=True, Tolerance=30ppm, Width="0.126 inch"
R1 R2 R3 R4 R5 R6 R7 R8 R9 R10 R11 R12 R13 R14 R23 R24 R25 R26 R27 R28 R29 R30 R31 R32 R33 R34 R35: library part R
R15 R16 R17 R18 R19 R20 R21 R22 R36 R37 R38 R39 R40 R41 R42 R43 R44 R45 R46 R47 R48 R49: library part R_1, "贴片电阻", BOM名称=贴片电阻, 学习资源=www.ooocke.com, 版权归属=源创客
SW1: library part CMP-2000-06884-2, "SWITCH SLIDE SPDT 300MA 6V", Contact Current Rating=300mA, Contact Resistance=70mR, Insulation Resistance=100mR, Max Operating Temperature=85°C, Max Voltage Rating (DC)=6V, Min Operating Temperature=-20°C, Package Quantity=1, Actuator Length=1.5mm, Actuator Material=Nylon, Actuator Type=Standard, Contact Material="Copper Alloy", Contact Plating=Silver, Current Rating=300mA, Depth=5mm, Lead Free="Lead Free", Length=7.7mm, Max Current Rating=300mA, Mechanical Life=10000Cycles, Mount="Surface Mount", Orientation="Right Angle", Packaging="Tape and Reel", REACH SVHC="No SVHC", Switch Function=On-On, Switch Travel=1.5mm, Termination="Gull Wing", Throw Configuration=SPDT, Voltage Rating (AC)=6V, Voltage Rating (DC)=6V, Width=6.7mm
U1 U2: library part MountingHole, Manufacturer=Vitramon, Part Number=VJ0805Y105KXQRW1BC
U3 U4 U5: library part CMP-0058-01043-3, "3V LVDS Quad CMOS Differential Line Driver, 16-pin Narrow SOIC, Pb-Free", Manufacturer="Texas Instruments", PackageTopMarking=NS2ZXYTTE#*DS90LV047A*TM, PowerWise=N, Code_IPC=SOIC127P600-16, Code_JEDEC=MS-012-AC, ComponentLink1Description="Datasheet URL", ComponentLink1URL=http://www.ti.com/general/docs/lit/getliterature.tsp?genericPartNumber=DS90LV047A&fileType=pdf, CompType="Interface IC", PackageDescription="Molded Package, SO, .150in Wide, 16 Lead", PackageReference=D0016A, PinCount=16, RoHS=Y
U6 U7: library part CMP-04872-000109-1, "IC RECEIVER 0/4 16TSSOP", Case/Package=TSSOP, Max Input Voltage=0uV, Max Operating Temperature=85°C, Max Power Dissipation=866mW, Max Supply Current=9mA, Max Supply Voltage=3.6V, Min Input Voltage=-100mV, Min Operating Temperature=-40°C, Min Supply Voltage=3V, Operating Supply Current=15mA, Operating Supply Voltage=3.3V, Package Quantity=2500, Power Consumption=30W, Data Rate=400Mbps, Height=0.9mm, Lead Free="Lead Free", Length=5mm, Logic Function=Receiver, Mount="Surface Mount", Number of Channels=4, Number of Drivers=4, Number of Elements=4, Number of Pins=16, Number of Receivers=4, Packaging="Tape and Reel", Power Dissipation=866mW, Propagation Delay=2.7ns, Radiation Hardening=No, REACH SVHC="No SVHC", RoHS Compliant=Yes, Turn-On Delay Time=2.7ns, Weight=0.002222oz, Width=4.4mm
U9: library part CMP-00370-119764918-1, "TXU0204QPWRQ1 Automotive four-channel fixed multidirectional level shifter 14-TSSOP -40 to 125", Ambient Temperature Range High=125°C, Case/Package=TSSOP, Manufacturer Lifecycle Status=ACTIVE, Max Junction Temperature (Tj)=150°C, Min Operating Temperature=-40°C, Nominal Supply Current=2.5µA, Data Rate=200Mbps, Height=1.2mm, Length=5mm, Lifecycle Status=Production, Max Operating Temperature=125°C, NexarPartId=119764918, Number of Bits=4, Number of Circuits=1, Number of Inputs=4, Number of Outputs=4, Number of Pins=14, Propagation Delay=8ns, Thickness=1mm, Width=4.4mm
U10: library part CMP-0188-00479-2, "12-Bit DAC with SPI Interface, 14-Pin SOIC 150mil, Extended Temperature, Tape and Reel", Code_IPC=SOIC127P600-14, Code_JEDEC=MS-012-AB, ComponentLink1Description="Manufacturer URL", ComponentLink1URL=http://www.microchip.com/, ComponentLink2Description=Datasheet, ComponentLink2URL=http://ww1.microchip.com/downloads/en/DeviceDoc/22250A.pdf, ComponentLink3Description="Package Specification", ComponentLink3URL=http://www.microchip.com/stellent/groups/techpub_sg/documents/packagingspec/en012702.pdf, DatasheetVersion="revA, Apr-2010", PackageDescription="14-Lead Plastic Small Outline (SL) - Narrow, 3.90mm Body [SOIC]", PackageReference=SOIC-SL14, PackageVersion="revBB, Aug-2009", RevisionNote="URLs added. DatasheetVersion updated. Sch updated."

## Via types
v1: diameter 0.4, hole 0.3, Top Layer to Bottom Layer, tented both sides, 484 vias

## Nets (pads, with @x,y where several pads share a name; then routed paths per layer and width w, separated by ;. In a path a pad name is that pad's centre, name@x,y a point inside that pad or via, vN(x,y) a via of type N, cw(c..) or ccw(c..) an arc to the next point about the centre after c; other vN are vias at no path point)
3V3: C1.1 C2.1 C3.2 C4.2 C5.2 C6.2 C7.2 C8.2 C11.2 C12.2 C13.2 C14.2 C15.2 C16.2 C17.2 C18.2 C19.2 C20.2 J1.1 J1.17 J8.12 J9.12 J10.12 J11.12 R25.1 R30.2 R36.1 R37.2 R39.1 R40.1 R42.1 R43.1 R46.1 R48.1 SW1.1 U3.1 U3.4 U4.1 U4.4 U5.1 U5.4 U6.13 U6.16 U7.13 U7.16 U9.1 U10.1 U10.9 U10.11 U10.13 | length 69.5
  Top Layer w0.15: v1(69.596,103.378) 69.672,103.454 R25.1@70.537,103.454 ; R30.2@110.686,125.349 110.686,124.772 v1(110.744,124.714) ; R37.2@121.666,72.39 v1(122.428,72.39)
  Top Layer w0.2: U3.4@63.627,89.112 U3.4@63.636,89.121 ; C3.2@63.627,90.397 C3.2@63.645,90.379 C3.2@63.636,90.37 ; C4.2@78.359,90.272 C4.2@78.383,90.297 ; U5.4@91.313,88.985 U5.4@91.316,88.988 ; C5.2@91.316,90.194 C5.2@91.319,90.197 ; U6.13@100.64,89.006 100.64,90.509 100.74,90.609 C6.2@100.775,90.609 100.804,90.58 101.317,90.58 v1(101.346,90.551) ; U7.13@109.276,89.006 109.375,89.105 109.375,90.198 C7.2@109.474,90.297 v1(110.065,90.297)
  Top Layer w0.3: SW1.1@54.443,90.007 56.352,90.007 v1(56.388,90.043) ; C3.2@63.627,90.397 v1(63.627,91.059) ; U3.4@63.636,89.121 C3.2@63.636,90.37 ; R36.1@64.096,58.547 v1(66.04,58.547) ; J8.12@65.179,63.52 65.598,63.52 65.855,63.264 65.855,62.611 65.94,62.526 65.94,62.476 65.99,62.426 C14.2@66.04,62.426 66.067,62.399 67.537,62.399 C13.2@67.564,62.372 v1(67.564,63.373) ; U3.1@67.437,89.112 v1(67.437,90.17) ; U9.1@75.326,110.883 75.347,110.862 C8.2@76.882,110.862 77.715,110.862 v1(77.724,110.871) ; U4.4@78.359,89.07 C4.2@78.359,90.272 ; v1(78.359,91.059) 78.383,91.035 C4.2@78.383,90.297 ; R39.1@81.934,58.547 v1(83.744,58.547) ; U4.1@82.169,89.07 v1(82.169,90.297) ; J9.12@82.619,63.52 83.038,63.52 83.295,63.264 83.295,62.57 83.339,62.526 83.339,62.476 83.389,62.426 C16.2@83.439,62.426 83.45,62.437 84.959,62.437 C15.2@84.97,62.448 84.963,62.455 v1(84.963,63.373) ; v1(91.313,90.932) 91.316,90.929 91.316,90.194 U5.4@91.316,88.988 ; U5.1@95.123,88.985 v1(95.123,90.297) ; v1(96.774,110.49) 96.789,110.475 C11.2@98.044,110.475 98.046,110.477 99.82,110.477 C12.2@99.822,110.479 99.827,110.485 102.193,110.485 U10.1@102.198,110.49 ; v1(97.917,89.027) 98.669,89.027 U6.16@98.69,89.006 ; R43.1@99.402,58.547 v1(100.711,58.547) ; J11.12@100.059,63.52 100.478,63.52 100.735,63.264 100.735,62.598 100.865,62.468 100.865,62.418 100.915,62.368 C20.2@100.965,62.368 100.967,62.37 102.614,62.37 C19.2@102.616,62.372 v1(102.616,63.5) ; v1(106.247,88.642) 106.239,88.633 107.251,88.633 107.326,88.708 U7.16@107.326,89.006 ; U10.9@107.098,104.14 v1(110.109,104.14) ; U10.11@107.098,106.68 v1(110.109,106.68) ; U10.13@107.098,109.22 v1(110.109,109.22) ; R48.1@116.692,58.504 118.321,58.504 v1(118.364,58.547) ; J10.12@117.499,63.52 117.918,63.52 118.174,63.264 118.174,62.743 118.391,62.526 118.391,62.476 118.441,62.426 C18.2@118.491,62.426 118.518,62.399 120.242,62.399 C17.2@120.269,62.372 v1(120.269,63.627) ; R40.1@122.301,87.249 v1(122.301,88.265) ; R46.1@122.32,75.311 123.317,75.311 v1(123.317,75.314) ; R42.1@122.389,81.153 v1(123.317,81.153)
  Top Layer w1: C2.1@62.864,126.013 J1.1@62.865,128.397 ; C1.1@83.185,126.033 J1.17@83.185,128.397
5V: J1.2 J1.4 SW1.3 | length 69.4
  Top Layer w0.2: v1(51.308,85.598) v1@51.399,85.507
  Top Layer w0.3: v1@51.399,85.507 SW1.3@54.443,85.507
  In_3 w0.3: v1(51.308,85.598) 50.292,85.598 50.038,85.852 50.038,132.588 52.578,135.128 58.674,135.128 J1.2@62.865,130.937 J1.4@65.405,130.937
Button_0: J1.31 KEY1.2 R37.1 | length 70.8
  Top Layer w0.15: v1(120.777,73.152) 120.796,73.133 120.796,72.41 R37.1@120.816,72.39 120.816,70.289 KEY1.2@120.813,70.286 KEY1.2@120.813,65.786
  In_2 w0.15: J1.31@100.965,128.397 100.965,122.428 120.777,102.616 v1(120.777,73.152)
CS: J1.8 R3.2 | length 6.8
  Top Layer w0.15: R3.2@69.215,124.656 69.215,129.667 J1.8@70.485,130.937
CS': R3.1 U3.2 U3.3 U3.6 U3.7 | length 49.8
  Top Layer w0.15: U3.7@59.817,89.112 59.817,88.812 60.017,88.612 60.398,88.612 61.126,87.884 61.965,87.884 ; U3.6@61.087,89.112 61.087,88.762 61.965,87.884 ; U3.3@64.897,89.112 64.897,88.762 64.697,88.562 64.648,88.562 63.969,87.884 ; U3.2@66.167,89.112 66.167,88.812 65.967,88.612 65.586,88.612 64.858,87.884 63.969,87.884 ; v1(69.215,121.666) R3.1@69.215,123.806 ; 61.965,87.884 v1(62.992,87.884) 63.969,87.884
  Bottom Layer w0.15: v1(62.992,87.884) 63.627,87.884 69.215,93.472 v1(69.215,121.666)
CS_A_N: J8.1 U3.9 | length 36.4
  Top Layer w0.12: J8.1@57.789,69.77 57.963,69.596 61.595,69.596 62.865,70.866 62.865,72.699 60.658,74.906 60.552,75.012 ccw(c59.977,74.438) 60.551,75.014 ccw(c59.977,74.438) 59.977,75.251 57.736,75.251 cw(c57.736,75.981) 57.736,76.711 60.198,76.711 ccw(c60.198,77.121) 60.198,77.531 57.736,77.531 cw(c57.736,78.261) 57.736,78.991 60.198,78.991 ccw(c60.198,79.401) 60.198,79.811 58.064,79.811 cw(c58.064,80.541) 58.064,81.271 58.612,81.271 ccw(c58.612,81.681) 59.022,81.681 59.022,82.533 59.022,83.792 58.952,83.862 U3.9@58.547,83.862
CS_A_P: J8.2 U3.10 | length 36.2
  Top Layer w0.12: U3.10@59.817,83.862 59.412,83.862 59.342,83.792 59.342,82.533 59.342,81.681 cw(c58.612,81.681) 58.612,80.951 58.064,80.951 ccw(c58.064,80.541) 58.064,80.131 60.198,80.131 cw(c60.198,79.401) 60.198,78.671 57.736,78.671 ccw(c57.736,78.261) 57.736,77.851 60.198,77.851 cw(c60.198,77.121) 60.198,76.391 57.736,76.391 ccw(c57.736,75.981) 57.736,75.571 59.977,75.571 cw(c59.977,74.438) 60.777,75.24 cw(c59.977,74.438) 60.778,75.239 60.988,75.029 63.185,72.832 63.185,70.733 62.217,69.766 62.217,69.666 62.288,69.596 62.611,69.596 62.994,69.596 cw(c62.994,69.436) 63.154,69.436 63.154,69.239 ccw(c63.314,69.239) 63.474,69.239 63.474,69.436 cw(c63.634,69.436) 63.634,69.596 63.694,69.596 65.005,69.596 J8.2@65.179,69.77
CS_B_N: J9.1 U3.12 | length 28.8
  Top Layer w0.12: U3.12@62.357,83.862 61.952,83.862 61.882,83.792 61.882,81.576 72.051,71.407 72.182,71.407 v1(72.236,71.353) ; J9.1@75.229,69.77 75.488,70.029 76.483,70.029 76.543,70.029 ccw(c76.543,70.189) 76.703,70.189 76.703,70.369 cw(c76.863,70.369) 77.023,70.369 77.023,70 ccw(c77.183,70) 77.343,70 77.343,70.189 cw(c77.503,70.189) 77.663,70.189 ccw(c77.823,70.189) 77.823,70.029 78.204,70.029 78.38,70.029 v1(78.413,70.062)
  In_2 w0.12: v1(72.236,71.353) 72.236,71.277 72.342,71.171 72.342,71.162 72.907,70.597 77.7,70.597 78.182,70.115 78.36,70.115 v1(78.413,70.062)
CS_B_P: J9.2 U3.11 | length 29.1
  Top Layer w0.12: U3.11@61.087,83.862 61.492,83.862 61.562,83.792 61.562,81.443 71.828,71.177 71.828,71.047 v1(71.882,70.993) ; v1(77.978,69.596) 82.445,69.596 J9.2@82.619,69.77
  In_2 w0.12: v1(71.882,70.993) 71.958,70.993 72.064,70.886 72.073,70.886 72.747,70.212 77.54,70.212 77.924,69.827 77.924,69.65 v1(77.978,69.596)
CS_C_N: J11.1 U3.13 | length 42.4
  Top Layer w0.12: U3.13@63.627,83.862 64.032,83.862 64.102,83.792 64.102,83.079 74.505,72.676 90.627,72.676 92.359,70.944 95.546,70.944 96.204,70.286 96.204,70.187 96.134,70.116 93.015,70.116 J11.1@92.669,69.77
CS_C_P: J11.2 U3.14 | length 42.4
  Top Layer w0.12: U3.14@64.897,83.862 64.492,83.862 64.422,83.792 64.422,83.211 74.637,72.996 90.76,72.996 92.492,71.264 95.679,71.264 96.524,70.419 96.524,70.187 96.594,70.116 99.713,70.116 J11.2@100.059,69.77
CS_D_N: J10.1 U3.16 | length 58.2
  Top Layer w0.12: U3.16@67.437,83.862 67.032,83.862 66.962,83.792 66.962,83.218 73.897,76.283 95.457,76.283 102.333,69.406 104.134,69.406 104.526,69.406 ccw(c104.526,69.616) 104.736,69.616 104.736,70.121 cw(c104.946,70.121) 105.156,70.121 105.156,69.616 ccw(c105.366,69.616) 105.576,69.616 105.576,70.202 cw(c105.786,70.202) 105.996,70.202 105.996,69.616 ccw(c106.206,69.616) 106.416,69.616 106.416,70.202 cw(c106.626,70.202) 106.836,70.202 106.836,69.616 ccw(c107.046,69.616) 107.256,69.616 107.256,70.202 cw(c107.466,70.202) 107.676,70.202 107.676,69.616 ccw(c107.886,69.616) 108.096,69.616 108.096,70.202 cw(c108.306,70.202) 108.516,70.202 108.516,69.616 ccw(c108.726,69.616) 108.726,69.406 109.206,69.406 109.273,69.406 109.29,69.424 109.763,69.424 J10.1@110.109,69.77
CS_D_P: J10.2 U3.15 | length 58.4
  Top Layer w0.12: U3.15@66.167,83.862 66.572,83.862 66.642,83.792 66.642,83.085 73.764,75.963 95.325,75.963 102.201,69.086 112.555,69.086 113.585,70.116 117.153,70.116 J10.2@117.499,69.77
DAC_OUT_0: J6.5 R32.2 | length 4.4
  Top Layer w0.3: R32.2@115.062,111.321 J6.5@115.062,115.697
DAC_OUT_1: J7.5 R33.2 | length 4.3
  Top Layer w0.3: J7.5@115.062,100.33 R33.2@115.062,104.648
DAC_SCLK: J1.37 R35.1 | length 28.5
  Top Layer w0.15: R35.1@97.644,106.68 97.028,106.68 95.377,108.331 95.377,113.03 108.585,126.238 J1.37@108.585,128.397
DAC_SDIN: J1.38 R31.1 | length 33.6
  Top Layer w0.15: R31.1@97.644,105.41 96.393,105.41 94.234,107.569 94.234,114.173 107.315,127.254 107.315,129.667 J1.38@108.585,130.937
DAC_SYNC: J1.40 R30.1 R34.1 | length 29.8
  Top Layer w0.15: R34.1@97.644,107.95 97.282,107.95 96.399,108.833 96.399,111.862 109.836,125.299 R30.1@109.836,125.349 109.855,125.368 109.855,129.667 J1.40@111.125,130.937
ERROR: J1.28 R44.1 | length 49.3
  Top Layer w0.15: v1(113.787,90.154) 113.787,89.559 113.871,89.475 113.871,89.425 113.996,89.3 R44.1@114.046,89.3
  In_2 w0.15: J1.28@95.885,130.937 95.885,130.81 96.012,130.81 97.155,129.667 97.155,121.031 113.787,104.399 v1(113.787,90.154)
ESD0: J2.5 R23.2 R28.2 | length 7
  Top Layer w0.3: R23.2@57.092,110.871 57.092,110.921 57.619,111.448 R28.2@59.563,111.448 J2.5@59.563,115.697
ESD1: J3.5 R24.2 R29.2 | length 7
  Top Layer w0.3: R24.2@57.092,105.156 57.092,105.106 57.619,104.579 R29.2@59.563,104.579 J3.5@59.563,100.33
ESD2: J4.5 R27.2 | length 4.1
  Top Layer w0.3: R27.2@87.249,104.452 87.281,104.42 87.281,100.362 J4.5@87.312,100.33
ESD3: J5.5 R26.2 | length 4.1
  Top Layer w0.3: J5.5@87.312,115.697 87.344,115.665 87.344,111.607 R26.2@87.376,111.575
GND: C1.2 C2.2 C3.1 C4.1 C5.1 C6.1 C7.1 C8.1 C9.1 C10.1 C11.1 C12.1 C13.1 C14.1 C15.1 C16.1 C17.1 C18.1 C19.1 C20.1 J1.6 J1.9 J1.14 J1.20 J1.25 J1.30 J1.34 J1.39 J2.1 J2.2 J2.3 J2.4 J3.1 J3.2 J3.3 J3.4 J4.1 J4.2 J4.3 J4.4 J5.1 J5.2 J5.3 J5.4 J6.1 J6.2 J6.3 J6.4 J7.1 J7.2 J7.3 J7.4 J8.11 J8.13 J8.14 J9.11 J9.13 J9.14 J10.11 J10.13 J10.14 J11.11 J11.13 J11.14 KEY1.1 LED3.2 Q1.2 Q2.2 Q3.2 Q4.2 Q5.2 Q6.2 R23.1 R24.1 SW1.4 SW1.5 SW1.6 SW1.7 U3.5 U3.8 U4.5 U4.8 U5.5 U5.8 U6.9 U6.12 U7.9 U7.12 U9.7 U10.8 U10.12 | length 43.3
  Top Layer w0.3: Q1.2@51.755,65.235 52.105,65.585 52.105,66.456 v1(52.197,66.548) ; v1(55.245,110.871) R23.1@56.242,110.871 ; v1(55.455,105.156) R24.1@56.242,105.156 ; v1(56.007,63.5) 56.017,63.51 57.779,63.51 J8.11@57.789,63.52 ; U3.8@58.547,89.112 v1(58.547,90.297) ; v1(61.595,90.297) 61.595,90.224 62.357,89.462 U3.5@62.357,89.112 ; v1(62.738,91.059) 62.745,91.052 C3.1@62.745,90.379 ; C2.2@62.863,122.612 64.292,122.612 64.362,122.682 v1(64.389,122.682) ; C14.1@66.04,61.526 66.09,61.476 66.667,61.476 v1(66.675,61.468) ; C13.1@67.564,61.072 67.795,61.303 68.161,61.303 v1(68.326,61.468) ; v1(68.58,64.643) 68.622,64.685 69.312,64.685 69.662,65.035 Q2.2@69.662,65.235 ; v1(71.374,112.395) 71.426,112.343 U9.7@71.426,110.883 ; U4.8@73.279,89.07 v1(73.279,90.424) ; v1(73.787,63.5) 75.209,63.5 J9.11@75.229,63.52 ; v1(76.454,112.522) 76.473,112.503 76.473,112.121 76.833,111.762 C8.1@76.883,111.762 ; v1(76.581,90.043) 76.581,89.928 77.089,89.42 U4.5@77.089,89.07 ; v1(77.47,90.932) 77.484,90.918 C4.1@77.484,90.297 ; v1(81.407,122.555) 81.434,122.555 81.512,122.633 C1.2@83.185,122.633 ; C16.1@83.439,61.526 83.489,61.476 84.066,61.476 v1(84.074,61.468) ; v1(84.963,89.027) 85.005,88.985 U5.8@86.233,88.985 ; C15.1@84.97,61.148 85.201,61.379 85.636,61.379 v1(85.725,61.468) ; v1(85.979,64.643) 87.145,64.643 Q4.2@87.188,64.6 ; v1(89.662,89.789) 89.662,89.716 90.043,89.335 U5.5@90.043,88.985 ; C5.1@90.419,90.197 90.419,90.8 v1(90.424,90.805) ; v1(91.059,63.5) 91.079,63.52 J11.11@92.669,63.52 ; v1(100.965,60.706) C20.1@100.965,61.468 ; C19.1@102.616,61.072 103.363,61.072 v1(103.363,61.066) ; v1(103.886,64.643) 104.798,64.643 Q6.2@104.841,64.6 ; v1(107.061,101.346) 107.098,101.383 U10.8@107.098,102.87 ; v1(108.585,63.5) 110.089,63.5 J10.11@110.109,63.52 ; v1(114.3,80.645) 114.366,80.579 Q5.2@114.366,79.205 ; Q3.2@114.427,85.09 v1(114.427,86.233) ; v1(116.459,87.249) LED3.2@118.11,87.249 ; v1(118.491,60.706) C18.1@118.491,61.526 ; C17.1@120.269,61.072 120.396,60.945 v1(120.396,60.325) ; v1(123.063,64.516) KEY1.1@123.063,65.786 ; KEY1.1@123.063,70.286 v1(123.063,71.628)
  other v1: 90,60 100,60 104,60 108,60 116,60 122,60 64,62 72,62 74,62 82,62 108,62 116,62 122,62 98,64 122,64 56,66 102,66 56,68 68,68 102,68 122,68 68,70 70,70 54,72 108,72 116,72 118,72 54,74 56,74 114,74 116,74 122,74 54,76 56,76 54,78 56,78 90,78 122,78 54,80 56,80 78,80 122,80 54,82 56,82 70,82 72,82 84,82 88,82 56,84 70,84 72,84 84,84 118,84 122,84 58,86 60,86 62,86 64,86 70,86 72,86 74,86 76,86 78,86 80,86 82,86 84,86 86,86 88,86 90,86 92,86 94,86 96,86 98,86 100,86 102,86 106,86 108,86 110,86 122,86 52,88 70,88 72,88 84,88 70,90 72,90 84,90 106,90 116,90 118,90 122,90 56,92 60,92 76,92 80,92 82,92 86,92 90,92 96,92 116,92 118,92 122,92 52,94 54,94 56,94 58,94 62,94 64,94 76,94 78,94 80,94 84,94 88,94 90,94 116,94 118,94 122,94 52,96 54,96 56,96 58,96 60,96 78,96 82,96 86,96 88,96 92,96 96,96 112,96 116,96 118,96 122,96 52,98 54,98 60,98 64,98 80,98 96,98 116,98 122,98 52,100 54,100 56,100 62,100 64,100 84,100 92,100 96,100 112,100 118,100 122,100 52,102 54,102 64,102 122,102 52,104 54,104 94,104 122,104 52,106 54,106 64,106 82,106 92,106 94,106 120,106 122,106 52,108 54,108 56,108 58,108 60,108 84,108 90,108 92,108 112,108 118,108 120,108 122,108 52,110 54,110 62,110 64,110 90,110 92,110 118,110 120,110 122,110 52,112 54,112 64,112 86,112 92,112 120,112 122,112 52,114 54,114 64,114 120,114 122,114 52,116 54,116 56,116 62,116 64,116 82,116 84,116 92,116 110,116 118,116 120,116 122,116 52,118 54,118 60,118 64,118 108,118 116,118 120,118 122,118 52,120 54,120 56,120 58,120 60,120 62,120 64,120 110,120 112,120 114,120 116,120 118,120 120,120 122,120 52,122 54,122 56,122 58,122 60,122 108,122 110,122 112,122 114,122 116,122 118,122 120,122 122,122 52,124 54,124 56,124 58,124 60,124 112,124 114,124 116,124 118,124 120,124 122,124 52,126 54,126 56,126 58,126 60,126 104,126 112,126 114,126 116,126 118,126 120,126 122,126 52,128 54,128 120,128 122,128 52,130 54,130 120,130 122,130 52,132 54,132 120,132 122,132 54,134 56,134 58,134 62,134 64,134 66,134 68,134 70,134 72,134 74,134 76,134 78,134 80,134 82,134 84,134 86,134 88,134 90,134 92,134 94,134 96,134 98,134 100,134 102,134 104,134 106,134 108,134 110,134 112,134 114,134 116,134 118,134 120,134 122,134
LED_A: J1.3 R38.1 | length 65.6
  Top Layer w0.15: v1(53.633,68.746) 53.633,67.789 R38.1@53.681,67.741
  In_2 w0.15: v1(53.633,68.746) 65.405,80.518 J1.3@65.405,128.397
LED_B: J1.5 R41.1 | length 78.4
  Top Layer w0.15: v1(69.595,67.819) 69.643,67.771 70.011,67.771 70.041,67.741 R41.1@71.585,67.741
  In_2 w0.15: J1.5@67.945,128.397 67.945,79.375 58.801,70.231 58.801,67.437 59.676,66.562 68.34,66.562 v1(69.595,67.819)
LED_C: J1.16 R45.1 | length 129.9
  Top Layer w0.2: v1(62.103,91.948) v1(70.866,91.948) ; R45.1@89.105,67.597 89.121,67.58 90.027,67.58 v1(90.043,67.564)
  In_2 w0.2: v1(70.866,91.948) 79.375,100.457 79.375,129.667 J1.16@80.645,130.937
  Bottom Layer w0.2: v1(62.103,91.948) 51.689,81.534 51.689,65.024 56.007,60.706 88.011,60.706 90.17,62.865 90.17,67.437 v1(90.043,67.564)
LED_D: J1.15 R49.1 | length 72.7
  Top Layer w0.2: v1(106.652,68.044) 106.652,67.99 106.752,67.89 R49.1@106.752,67.013 ; v1(106.68,71.12) v1(106.68,72.771)
  In_2 w0.2: J1.15@80.645,128.397 80.645,108.836 107.315,82.166 107.315,73.406 v1(106.68,72.771)
  Bottom Layer w0.2: v1(106.652,68.044) 106.68,68.072 v1(106.68,71.12)
MISO_A1: J1.18 R10.2 | length 45.8
  Top Layer w0.15: R10.2@98.425,91.509 v1(98.425,92.837)
  In_2 w0.15: J1.18@83.185,130.937 83.185,130.81 J1.18@83.312,130.81
  Bottom Layer w0.15: J1.18@83.312,130.81 84.455,129.667 84.455,121.852 98.425,107.882 v1(98.425,92.837)
MISO_A1': R10.1 U6.15 | length 2.1
  Top Layer w0.15: R10.1@98.425,90.659 98.475,90.659 99.19,89.944 99.19,89.156 U6.15@99.34,89.006
MISO_A1_N: J8.7 R15.2 U6.1 | length 51.6
  Top Layer w0.12: J8.7@57.789,66.02 61.321,66.02 v1(61.341,66.04) ; v1(96.547,77.824) 96.601,77.877 96.728,77.877 97.986,79.135 97.986,80.26 97.986,80.639 97.916,80.709 97.861,80.709 97.721,80.849 97.721,80.949 97.861,81.089 97.916,81.089 98.048,81.221 98.048,81.609 98.785,82.346 98.785,82.971 98.855,83.041 U6.1@98.69,83.206
  Bottom Layer w0.12: v1(61.341,66.04) 63.815,68.514 63.815,70.425 69.717,76.327 95.178,76.327 96.494,77.643 96.494,77.77 v1(96.547,77.824)
MISO_A1_P: J8.8 R15.1 U6.2 | length 51.9
  Top Layer w0.12: v1(61.695,65.686) 62.028,66.02 J8.8@65.179,66.02 ; v1(96.901,77.47) 96.955,77.524 96.955,77.651 98.306,79.002 98.306,80.393 98.306,80.639 98.376,80.709 98.431,80.709 98.571,80.849 98.571,80.949 98.368,81.153 98.368,81.477 99.175,82.284 99.175,83.041 U6.2@99.34,83.206
  Bottom Layer w0.12: v1(61.695,65.686) 61.716,65.708 61.716,65.962 64.135,68.381 64.135,70.292 69.85,76.007 95.311,76.007 96.72,77.416 96.847,77.416 v1(96.901,77.47)
MISO_A2: J1.19 R14.2 | length 42.6
  Top Layer w0.12: v1(99.568,92.837) 99.568,91.541 R14.2@99.6,91.509
  Bottom Layer w0.12: J1.19@85.725,128.397 85.725,124.166 99.568,110.323 v1(99.568,92.837)
MISO_A2': R14.1 U6.14 | length 1.8
  Top Layer w0.15: R14.1@99.6,90.659 99.6,90.228 99.846,89.981 99.846,89.15 U6.14@99.99,89.006
MISO_A2_N: J8.9 R16.2 U6.4 | length 53.6
  Top Layer w0.12: J8.9@57.789,64.77 57.945,64.614 61.304,64.614 v1(61.341,64.651) ; v1(100.33,78.486) 100.33,78.562 100.238,78.654 100.238,79.614 100.261,79.638 100.261,80.639 100.331,80.709 100.386,80.709 100.526,80.849 100.526,80.949 100.386,81.089 100.331,81.089 100.261,81.159 100.261,81.929 100.475,82.143 100.475,83.041 U6.4@100.64,83.206
  Bottom Layer w0.12: v1(61.341,64.651) 61.417,64.651 61.507,64.741 67.48,64.741 76.78,74.041 95.885,74.041 99.975,78.131 v1(100.33,78.486)
MISO_A2_P: J8.10 R16.1 U6.3 | length 53.3
  Top Layer w0.12: v1(61.341,65.151) 61.376,65.116 64.833,65.116 J8.10@65.179,64.77 ; v1(99.825,78.491) 99.825,78.566 99.918,78.659 99.918,79.747 99.941,79.77 99.941,80.639 99.871,80.709 99.816,80.709 99.676,80.849 99.676,80.949 99.816,81.089 99.871,81.089 99.941,81.159 99.941,82.062 100.155,82.276 100.155,83.041 U6.3@99.99,83.206
  Bottom Layer w0.12: v1(61.341,65.151) 61.417,65.151 61.507,65.061 67.347,65.061 76.647,74.361 95.752,74.361 99.825,78.434 v1(99.825,78.491)
MISO_B1: J1.21 R9.2 | length 42.6
  Top Layer w0.12: R9.2@101.949,91.509 101.981,91.541 v1(101.981,92.837)
  Bottom Layer w0.12: J1.21@88.265,128.397 88.265,124.841 101.981,111.125 v1(101.981,92.837)
MISO_B1': R9.1 U6.11 | length 1.7
  Top Layer w0.15: U6.11@101.94,89.006 101.94,90.65 R9.1@101.949,90.659
MISO_B1_N: J9.7 R17.2 U6.5 | length 38.4
  Top Layer w0.12: J9.7@75.229,66.02 75.237,66.012 76.593,66.012 76.653,66.012 ccw(c76.653,66.172) 76.813,66.172 76.813,66.558 cw(c76.973,66.558) 77.133,66.558 77.133,66.172 ccw(c77.293,66.172) 77.293,66.012 77.945,66.012 v1(78.26,66.012) ; U6.5@101.29,83.206 101.455,83.041 101.455,82.066 101.865,81.656 101.865,81.159 101.795,81.089 101.74,81.089 101.6,80.949 101.6,80.849 101.74,80.709 101.795,80.709 101.865,80.639 101.865,79.733 101.858,79.725 101.858,78.97 101.768,78.88 v1(101.768,78.804)
  Bottom Layer w0.12: v1(78.26,66.012) 78.313,66.066 78.44,66.066 83.621,71.247 94.919,71.247 101.858,78.186 101.858,78.638 101.768,78.728 v1(101.768,78.804)